# Allegro board tunnel lighting2.brd
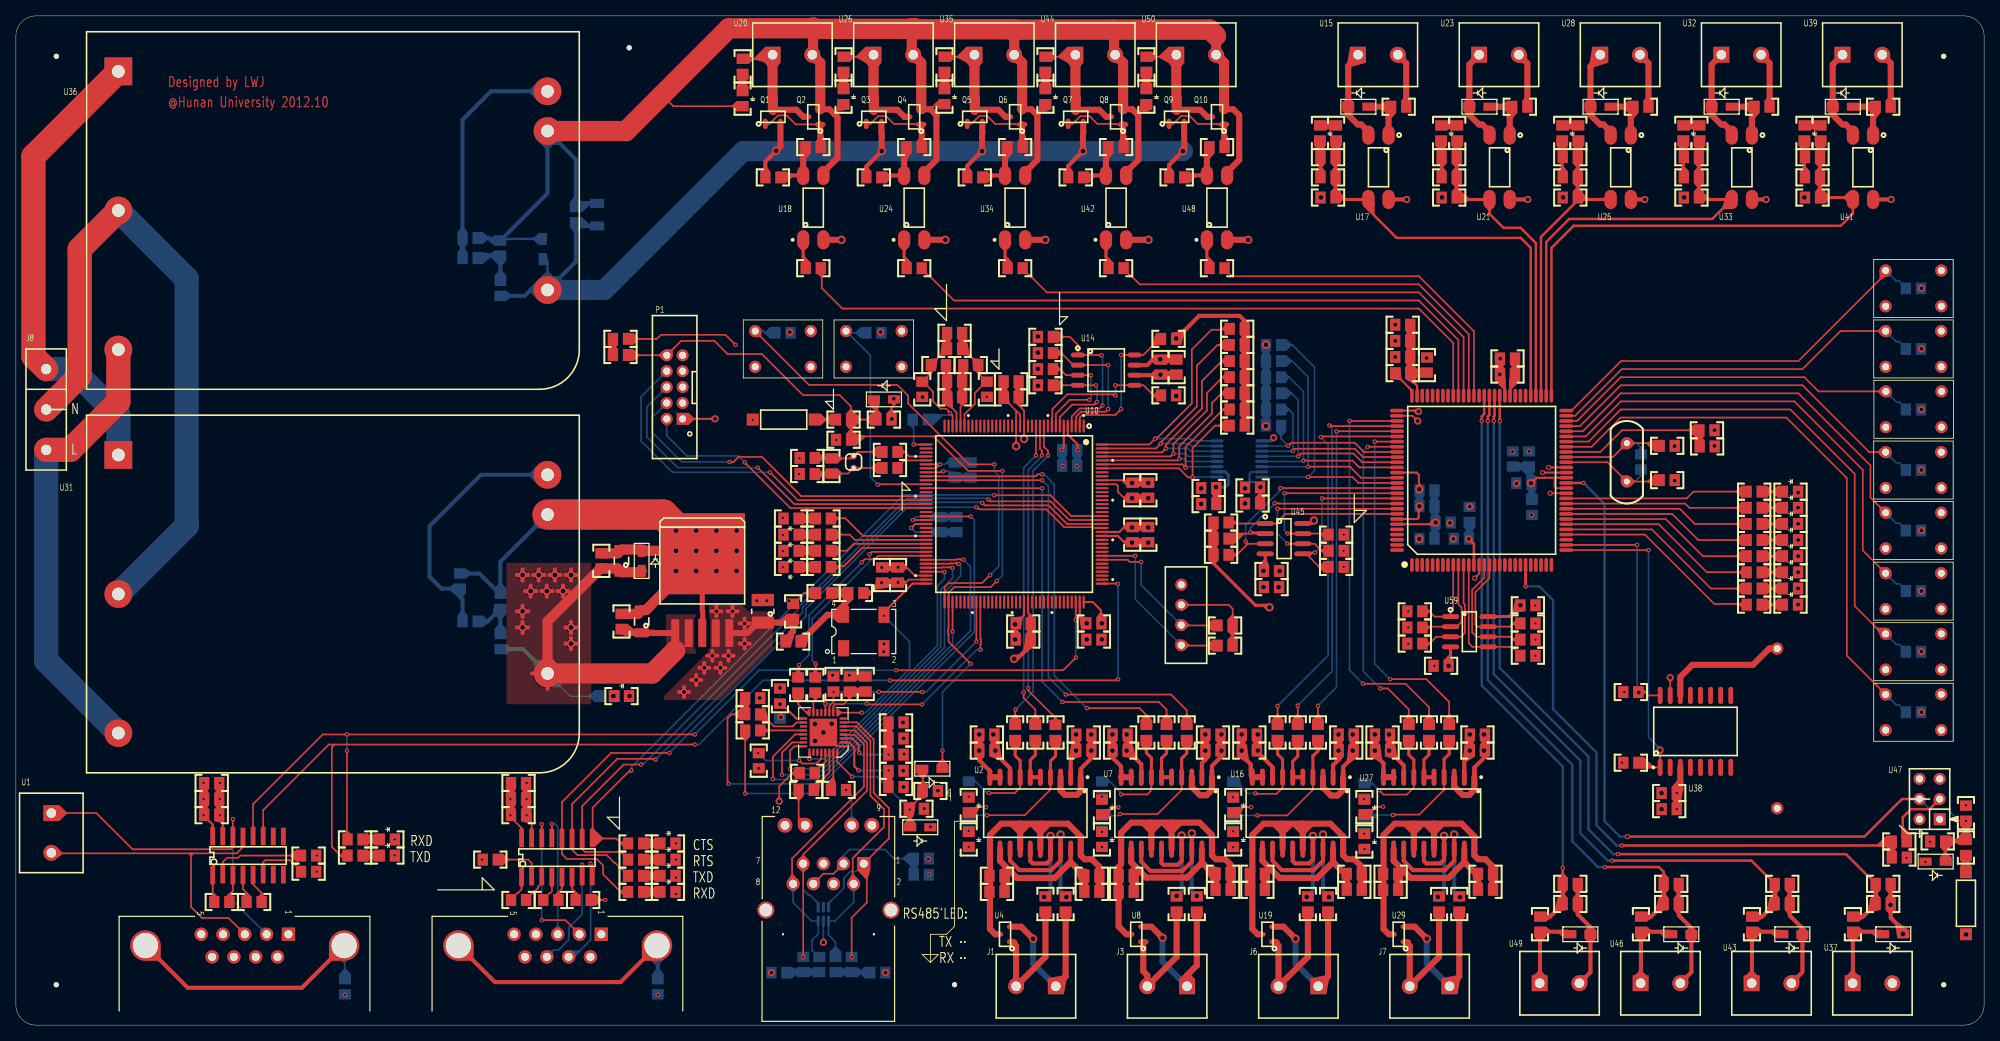
[diagram p0: board, top side]
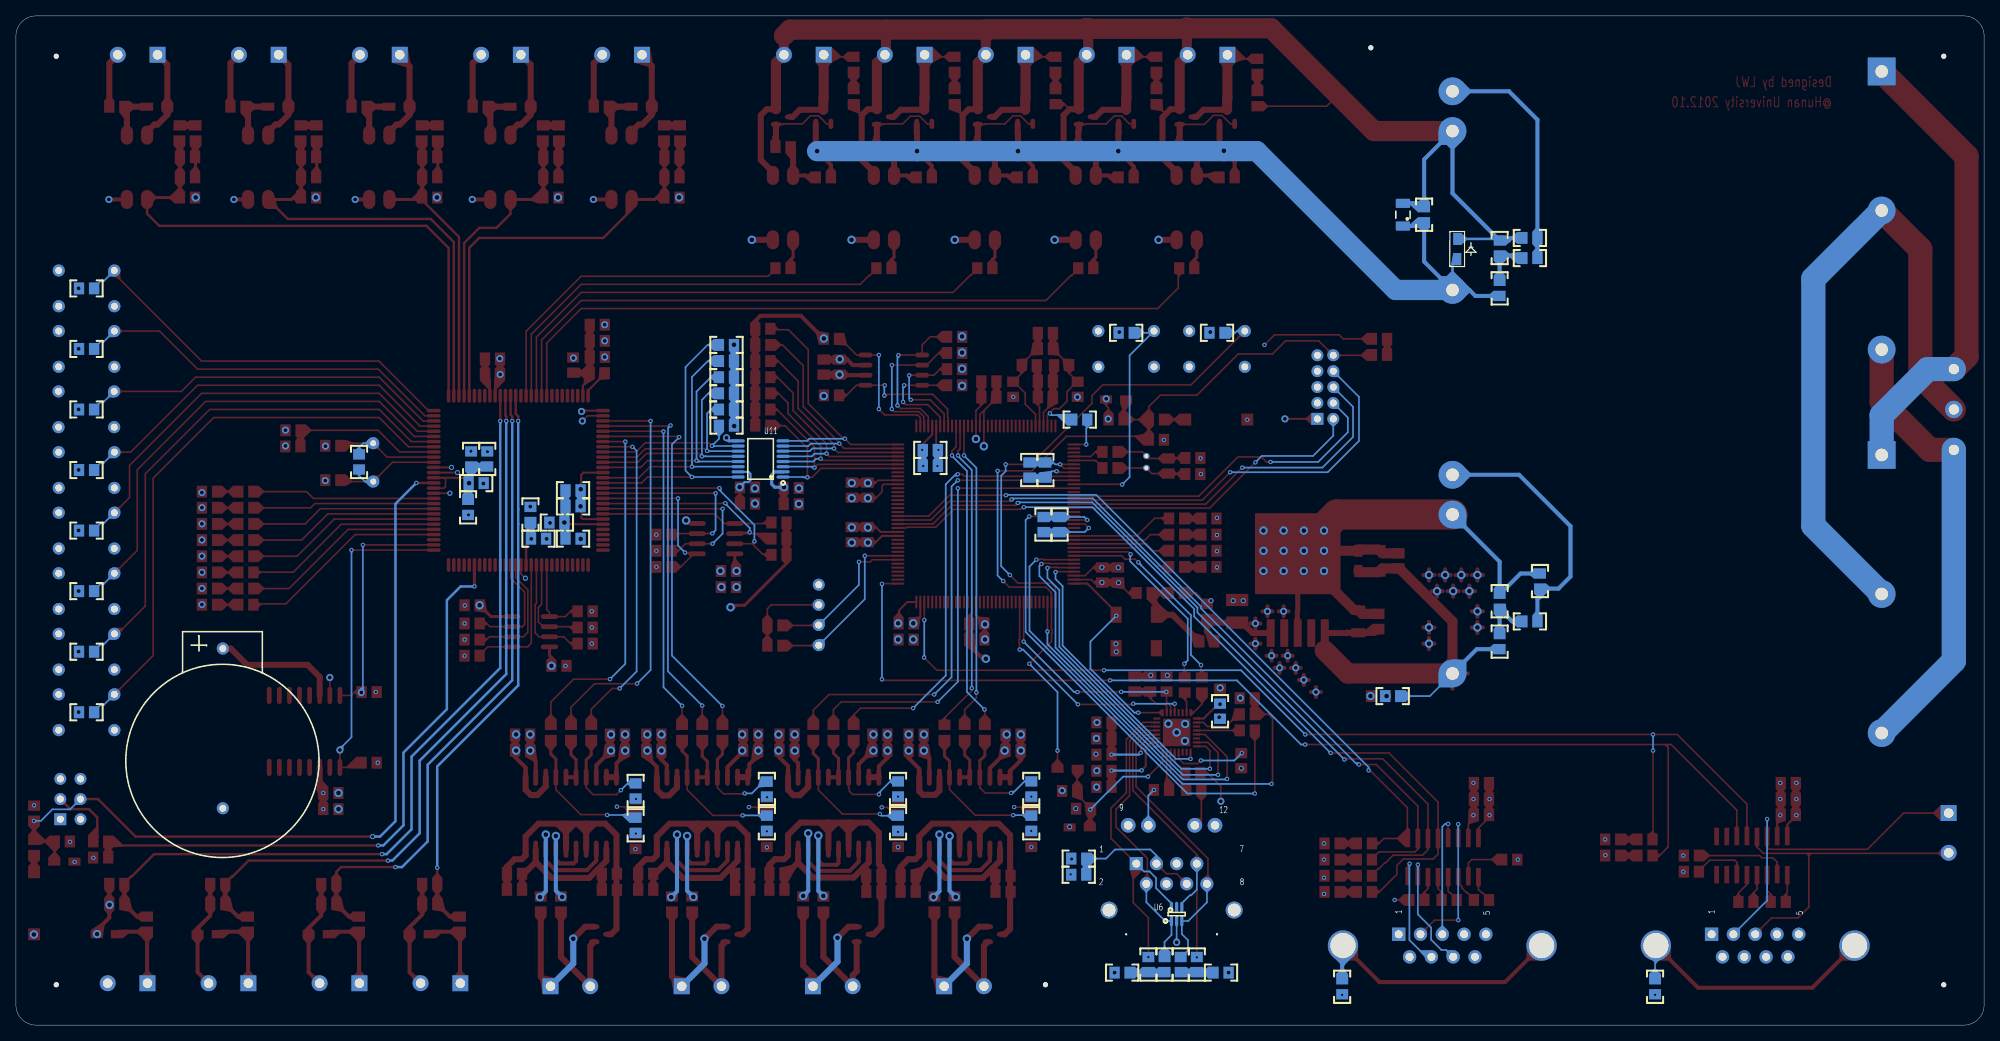
[diagram p1: board, bottom side, seen from below]

Outline 247.65 x 127 mm; copper layers: TOP, GND, POWER, BOTTOM. Coordinates in mm from the lower left corner of the outline.
Outline path: 0,124.46 arc(0.74,126.26) 2.54,127 245.11,127 arc(246.91,126.26) 247.65,124.46 247.65,2.54 arc(246.91,0.74) 245.11,0 2.54,0 arc(0.74,0.74) 0,2.54 0,124.46

## Placement (name value [footprint] x y rotation side)
C1  10uF  [0805]  135.38 18.8 0 top
C2  0.1uF  [0805]  135.38 16.76 0 top
C3  10uF  [0805]  134.37 36.58 0 top
C4  0.1uF  [0805]  134.37 34.54 0 top
C5  0.1uF  [0805]  96.14 41.4 270 top
C6  22uF  [0805]  96.14 39.5 270 bottom
C7  0.01uF  [0805]  24.64 26.42 0 top
C8  0.1uF  [0805]  24.64 30.48 0 top
C9  10uF  [0805]  24.64 28.45 0 top
C10  22uF  [0805]  110.74 36.07 0 top
C11  0.1uF  [0805]  110.74 38.1 180 top
C12  0.1uF  [0805]  110.74 32 180 top
C13  10uF  [0805]  110.74 29.97 0 top
C14  10uF  [0805]  123.44 16.76 180 top
C15  0.1uF  [0805]  123.44 18.8 180 top
C16  10uF  [0805]  122.17 34.54 180 top
C17  0.1uF  [0805]  122.17 36.58 180 top
C18  0.1uF  [0805]  25.91 15.49 0 top
C19  0.1uF  [0805]  29.97 15.49 0 top
C20  100pF  [0805]  106.93 42.93 90 top
C21  0.1uF  [0805]  36.83 21.34 0 top
C22  0.1uF  [0805]  36.83 19.3 0 top
C23  10uF  [0805]  115.06 29.46 0 top
C24  10uF  [0805]  138.94 36.58 180 top
C25  0.1uF  [0805]  138.94 34.54 180 top
C26  10uF  [0805]  139.7 18.8 180 top
C27  0.1uF  [0805]  139.7 16.76 180 top
C28  0.1uF  [0805]  142.49 61.72 270 top
C29  0.01uF  [0805]  140.46 61.72 270 top
C30  0.1uF  [0805]  140.46 67.31 270 top
C31  0.01uF  [0805]  142.49 67.31 270 top
C32  0.01uF  [0805]  63.25 26.42 0 top
C33  0.1uF  [0805]  63.25 28.45 0 top
C34  10uF  [0805]  63.25 30.48 0 top
C35  10uF  [0805]  113.92 18.92 0 bottom
C36  10uF  [0805]  151.89 19.05 0 top
C37  0.1uF  [0805]  151.89 17.02 0 top
C38  10uF  [0805]  150.62 34.54 0 top
C39  0.1uF  [0805]  150.62 36.58 0 top
C40  0.1uF  [0805]  63.25 15.75 0 top
C41  0.1uF  [0805]  67.31 15.75 0 top
C42  0.1uF  [0805]  59.69 20.83 180 top
C43  0.1uF  [0805]  71.37 15.75 0 top
C44  0.1uF  [0805]  126.75 50.55 180 top
C45  0.01uF  [0805]  126.75 48.51 180 top
C46  0.1uF  [0805]  132.59 72.39 180 bottom
C47  0.01uF  [0805]  132.59 70.36 180 bottom
C48  0.1uF  [0805]  96.01 6.6 180 bottom
C49  0.1uF  [0805]  108.46 6.6 0 bottom
C50  0.1uF  [0805]  135.64 50.55 180 top
C51  0.01uF  [0805]  135.64 48.51 180 top
C52  0.1uF  [0805]  125.22 81.03 180 top
C53  0.01uF  [0805]  125.22 78.99 180 top
C54  10uF  [0805]  150.09 67.59 180 top
C55  0.1uF  [0805]  150.09 65.56 180 top
C56  10uF  [0805]  155.6 65.63 180 top
C57  0.1uF  [0805]  155.6 67.67 180 top
C58  0.1uF  [0805]  118.11 78.99 180 top
C59  0.1uF  [0805]  118.11 85.09 180 top
C60  0.01uF  [0805]  118.11 87.12 180 top
C61  0.01uF  [0805]  118.11 81.03 180 top
C62  0.1uF  [0805]  113.79 76.2 180 bottom
C63  10uF  [0805]  146.05 82.8 90 top
C64  0.1uF  [0805]  144.02 82.8 90 top
C65  10uF  [0805]  101.63 54.38 180 top
C66  0.1uF  [0805]  105.69 54.38 0 top
C67  18PF  [0805]  99.57 71.37 0 top
C68  0.1uF  [0805]  111 56.64 270 top
C69  0.01uF  [0805]  108.97 56.64 270 top
C70  0.1uF  [0805]  118.11 69.85 270 bottom
C71  0.01uF  [0805]  120.14 69.85 270 bottom
C72  0.1uF  [0805]  116.33 62.99 270 bottom
C73  0.01uF  [0805]  118.36 62.99 270 bottom
C74  0.1uF  [0805]  104.14 73.66 0 top
C75  18PF  [0805]  99.57 69.34 0 top
C76  103  [0805]  177.55 65.28 180 bottom
C77  104  [0805]  177.55 61.21 180 bottom
C78  10u  [0805]  177.55 67.31 180 bottom
C79  10uF  [0805]  155.19 34.54 180 top
C80  0.1uF  [0805]  155.19 36.58 180 top
C81  10uF  [0805]  156.21 19.05 180 top
C82  0.1uF  [0805]  156.21 17.02 180 top
C83  0.1uF  [0805]  165.1 106.68 180 top
C84  0.01uF  [0805]  165.1 109.22 180 top
C85  10uF  [0805]  167.39 36.58 0 top
C86  10uF  [0805]  168.4 19.05 0 top
C87  0.1uF  [0805]  168.4 17.02 0 top
C88  0.1uF  [0805]  167.39 34.54 0 top
C89  103  [0805]  174.5 86.11 180 top
C90  104  [0805]  174.5 84.07 180 top
C91  10u  [0805]  174.5 88.14 180 top
C92  0.1uF  [0805]  180.34 109.22 180 top
C93  0.01uF  [0805]  180.34 106.68 180 top
C94  220n  [0805]  182.91 64.26 90 bottom
C95  102  [0805]  181.89 61.21 180 bottom
C96  10uF  [0805]  171.96 34.54 180 top
C97  0.1uF  [0805]  171.96 36.58 180 top
C98  10uF  [0805]  172.97 19.05 180 top
C99  0.1uF  [0805]  172.97 17.02 180 top
C100  220n  [0805]  187.68 81.86 180 top
C101  102  [0805]  187.68 83.9 180 top
C102  0.1uF  [0805]  195.58 109.22 180 top
C103  0.01uF  [0805]  195.58 106.68 180 top
C104  10uF  [0805]  184.91 19.05 0 top
C105  0.1uF  [0805]  184.91 17.02 0 top
C106  10uF  [0805]  183.9 34.54 0 top
C107  0.1uF  [0805]  183.9 36.58 0 top
C108  10uF  [CAPA]  76.2 58.42 90 top
C109  0.1uF  [0805]  73.66 58.42 90 top
C110  10uF  [CAPA]  78.74 50.8 90 top
C111  0.1uF  [0805]  76.2 50.8 90 top
C112  22uF  [CAPB]  93.98 52.07 90 top
C113  0.1uF  [0805]  97.79 52.07 90 top
C114  103  [0805]  190.37 71.25 90 bottom
C115  104  [0805]  188.34 71.25 90 bottom
C116  10u  [0805]  190.75 65.15 270 bottom
C117  0.1uF  [0805]  210.82 109.22 180 top
C118  0.01uF  [0805]  210.82 106.68 180 top
C119  10uF  [CAPA]  73.13 101.98 90 bottom
C120  0.1uF  [0805]  70.46 101.98 90 bottom
C121  0.1uF  [0805]  234.95 17.78 0 top
C122  0.1uF  [0805]  234.95 15.24 0 top
C123  10uF  [0805]  208.03 29.21 180 top
C124  0.1uF  [0805]  208.03 27.18 180 top
C125  0.1uF  [0805]  226.06 106.68 180 top
C126  0.01uF  [0805]  226.06 109.22 180 top
C127  0.1uF  [0805]  222.25 17.78 0 top
C128  0.1uF  [0805]  222.25 15.24 0 top
C129  104  [0805]  245.36 26.67 270 top
C130  22p  [0805]  207.77 68.58 0 top
C131  220n  [0805]  212.78 74.85 0 top
C132  22p  [0805]  207.77 72.9 0 top
C133  102  [0805]  212.8 72.82 0 top
C134  0.1uF  [0805]  208.28 15.24 0 top
C135  0.1uF  [0805]  157.99 57.15 180 top
C136  10uF  [0805]  157.99 55.12 180 top
C137  0.1uF  [0805]  195.58 15.24 0 top
C138  0.1uF  [0805]  190.25 52.83 0 top
C139  10uF  [0805]  179.32 45.21 0 top
D1  RED  [0805_LED]  119.89 23.37 270 top
D2  BLUE  [0805_LED]  119.89 27.69 270 top
D3  RED  [0805_LED]  46.74 21.34 0 top
D4  BLUE  [0805_LED]  46.74 23.37 0 top
D5  SCS120V  [SOD-323]  115.32 32.26 0 top
D6  SCS120V  [SOD-323]  113.79 24.89 0 top
D7  RED  [0805_LED]  136.65 23.37 270 top
D8  RED  [0805_LED]  82.04 16.76 0 top
D9  BLUE  [0805_LED]  82.04 18.8 0 top
D10  BLUE  [0805_LED]  136.65 27.43 270 top
D11  RED  [0805_LED]  82.04 20.83 0 top
D12  RED  [0805_LED]  97.54 59.69 180 top
D13  BLUE  [0805_LED]  82.04 22.86 0 top
D14  RED  [0805_LED]  97.54 57.66 180 top
D15  BLUE  [0805_LED]  97.54 63.75 180 top
D16  RED  [0805_LED]  97.54 61.72 180 top
D17  1N6392  [SOD-323]  109.22 78.74 180 top
D18  LED  [0805]  76.07 84.33 0 top
D19  1N4376  [SOD-323]  168.91 115.57 180 top
D20  1N4376  [SOD-323]  184.15 115.57 180 top
D21  RED  [0805_LED]  153.16 23.37 270 top
D22  BLUE  [0805_LED]  153.16 27.69 270 top
D23  1N4376  [SOD-323]  199.39 115.57 180 top
D24  1N4678  [SOD-323]  78.74 58.42 90 top
D25  RED  [0805_LED]  169.67 23.11 270 top
D26  1N4376  [SOD-323]  214.63 115.57 180 top
D27  LED  [0805_LED]  76.2 41.4 0 top
D28  BLUE  [0805_LED]  169.67 27.43 270 top
D29  1N4678  [SOD-323]  66.29 97.66 90 bottom
D30  1N4678  [SOD-323]  236.22 11.43 0 top
D31  1N4376  [SOD-323]  229.87 115.57 180 top
D32  1N6392  [SOD-323]  241.55 20.57 0 top
D33  1N4678  [SOD-323]  223.52 11.43 0 top
D34  LED  [0805_LED]  223.29 52.91 0 top
D35  LED  [0805_LED]  223.29 54.94 0 top
D36  1N4678  [SOD-323]  209.55 11.43 0 top
D37  LED  [0805_LED]  223.29 56.97 0 top
D38  LED  [0805_LED]  223.29 59 0 top
D39  LED  [0805_LED]  223.29 61.04 0 top
D40  LED  [0805_LED]  223.29 63.07 0 top
D41  LED  [0805_LED]  223.29 65.1 0 top
D42  1N4678  [SOD-323]  196.85 11.43 0 top
D43  LED  [0805_LED]  223.29 67.13 0 top
D44  LED  [0805_LED]  91.44 116.59 270 top
D45  LED  [0805_LED]  104.14 116.84 270 top
D46  LED  [0805_LED]  116.84 116.84 270 top
D47  LED  [0805_LED]  129.54 116.84 270 top
D48  LED  [0805_LED]  142.24 116.84 270 top
D49  LED  [0805_LED]  164.08 112.27 270 top
D50  LED  [0805_LED]  179.32 112.27 270 top
D51  LED  [0805_LED]  194.56 112.27 270 top
D52  LED  [0805_LED]  209.8 112.27 270 top
D53  LED  [0805_LED]  225.04 112.27 270 top
J1  CON2  [WJ127_2]  133.35 8.89 180 top
J2  DB9  [CON_DB9S_RA_318]  34.29 11.43 270 top
J3  CON2  [WJ127_2]  149.86 8.89 180 top
J4  DB9  [CON_DB9S_RA_318]  73.66 11.43 270 top
J5  RJ45-8  [CON8_RJ45_TH1]  106.68 20.32 0 top
J6  CON2  [WJ127_2]  166.37 8.89 180 top
J7  CON2  [WJ127_2]  182.88 8.89 180 top
J8  CON3  [WJ2EDGK]  3.81 82.55 270 top
L1  100MHZ  [0805]  110.74 34.04 0 top
L2  470OHM  [0805]  41.4 4.83 270 bottom
L3  100MHZ  [0805]  113.92 20.96 180 bottom
L4  470OHM  [0805]  80.77 4.83 270 bottom
L5  100MHZ  [0805]  122.17 80.01 270 top
L6  100MHZ  [0805]  120.14 83.06 0 top
L7  100MHZ  [0805]  116.08 83.06 180 top
L8  100MHZ  [0805]  114.05 80.01 270 top
L9  120OHM  [0805]  97.79 48.26 180 top
L10  100uH  [0805]  179.58 63.25 180 bottom
L11  100uH  [0805]  177.55 83.06 90 top
L12  100uH  [0805]  189.74 68.2 0 bottom
NOREF  -  [unnamed]  5.08 121.92 0 top
NOREF#2  -  [unnamed]  242.57 121.92 0 top
NOREF#3  -  [unnamed]  118.11 5.08 0 top
NOREF#4  -  [unnamed]  242.57 5.08 0 top
NOREF#5  -  [unnamed]  77.17 122.99 0 top
NOREF#6  -  [unnamed]  5.08 5.08 0 top
P1  HEADER2X5  [CON10_2X5_2MM]  83.82 76.2 90 top
P2  HEADER1X4  [SIP4]  146.63 51.61 0 top
Q1  IRLML5203  [SOT95P237X112-3]  95.25 114.3 0 top
Q2  IRLML2803  [SOT95P237X112-3]  100.33 114.3 90 top
Q3  IRLML5203  [SOT95P237X112-3]  107.95 114.3 0 top
Q4  IRLML2803  [SOT95P237X112-3]  113.03 114.3 90 top
Q5  IRLML5203  [SOT95P237X112-3]  120.65 114.3 0 top
Q6  IRLML2803  [SOT95P237X112-3]  125.73 114.3 90 top
Q7  IRLML5203  [SOT95P237X112-3]  133.35 114.3 0 top
Q8  IRLML2803  [SOT95P237X112-3]  138.43 114.3 90 top
Q9  IRLML5203  [SOT95P237X112-3]  146.05 114.3 0 top
Q10  IRLML2803  [SOT95P237X112-3]  151.13 114.3 90 top
R1  100R  [0805]  132.08 15.24 270 top
R2  33R  [0805]  130.81 36.83 270 top
R3  33R  [0805]  128.27 36.83 270 top
R4  100R  [0805]  129.54 15.24 270 top
R5  33R  [0805]  125.73 36.83 270 top
R6  33R  [0805]  92.71 39.12 180 top
R7  33R  [0805]  92.71 37.08 180 top
R8  10K  [0805]  92.71 41.15 0 top
R9  10K  [0805]  119.89 25.4 270 bottom
R10  6.49K  [0805]  104.9 42.93 270 top
R11  4.7K  [0805]  102.87 42.93 270 top
R12  10K  [0805]  93.47 33.27 270 top
R13  10K  [0805]  99.57 31.75 180 top
R14  10K  [0805]  119.89 29.72 270 bottom
R15  10K  [0805]  42.67 21.34 0 top
R16  33R  [0805]  100.58 42.8 270 top
R17  33R  [0805]  98.42 42.8 270 top
R18  10K  [0805]  113.31 27.23 0 top
R19  10K  [0805]  42.67 23.37 0 top
R20  100R  [0805]  148.59 15.24 270 top
R21  33R  [0805]  147.32 36.83 270 top
R22  100R  [0805]  146.05 15.24 270 top
R23  33R  [0805]  144.78 36.83 270 top
R24  33R  [0805]  142.24 36.83 270 top
R25  10K  [0805]  136.65 25.4 270 bottom
R26  330  [0805]  103.5 29.59 180 top
R27  49.9  [0805]  101.09 7.62 90 bottom
R28  49.9  [0805]  103.12 7.62 90 bottom
R29  10K  [0805]  77.98 16.76 0 top
R30  10K  [0805]  77.98 18.8 0 top
R31  10K  [0805]  136.65 29.72 270 bottom
R32  49.9  [0805]  99.06 7.62 90 bottom
R33  49.9  [0805]  105.16 7.62 90 bottom
R34  330  [0805]  99.44 29.59 0 top
R35  10K  [0805]  77.98 20.83 0 top
R36  4.7K  [0805]  96.52 87.12 180 bottom
R37  4.7K  [0805]  153.67 75.44 180 top
R38  4.7K  [0805]  158.24 85.6 180 bottom
R39  4.7K  [0805]  153.67 77.47 180 top
R40  4.7K  [0805]  107.95 87.12 180 bottom
R41  4.7K  [0805]  158.24 83.57 180 bottom
R42  4.7K  [0805]  153.67 79.5 180 top
R43  4.7K  [0805]  158.24 81.53 180 bottom
R44  10K  [0805]  101.6 59.69 180 top
R45  4.7K  [0805]  153.67 81.53 180 top
R46  4.7K  [0805]  158.24 79.5 180 bottom
R47  10K  [0805]  77.98 22.86 0 top
R48  4.7K  [0805]  153.67 83.57 180 top
R49  4.7K  [0805]  158.24 77.47 180 bottom
R50  4.7K  [0805]  153.67 85.6 180 top
R51  4.7K  [0805]  158.24 75.44 180 bottom
R52  4.7K  [0805]  153.67 87.63 180 top
R53  10K  [0805]  101.6 57.66 180 top
R54  10K  [0805]  101.6 63.75 180 top
R55  10K  [0805]  101.6 61.72 180 top
R56  4.7K  [0805]  145.03 86.36 180 top
R57  4.7K  [0805]  129.54 86.61 0 top
R58  4.7K  [0805]  152.15 50.29 180 top
R59  4.7K  [0805]  129.54 84.58 0 top
R60  4.7K  [0805]  152.15 47.75 180 top
R61  4.7K  [0805]  129.54 82.55 0 top
R62  4.7K  [0805]  129.54 80.52 0 top
R63  4.7K  [0805]  145.03 79.25 0 top
R64  10K  [0805]  109.22 76.2 0 top
R65  0  [0805]  109.98 72.14 0 top
R66  100R  [0805]  104.14 76.2 0 top
R67  1.0M  [0805]  102.62 70.36 270 top
R68  0  [0805]  109.98 70.1 0 top
R69  4.7K  [0805]  76.07 86.36 180 top
R70  10K  [0805]  173.99 115.57 180 top
R71  10K  [0805]  95.25 106.68 180 top
R72  10K  [0805]  100.33 110.49 180 top
R73  100R  [0805]  165.1 15.24 270 top
R74  33R  [0805]  163.83 36.83 270 top
R75  1K  [0805]  100.33 95.25 180 top
R76  100R  [0805]  162.56 15.24 270 top
R77  3.3K  [0805]  165.1 104.14 180 top
R78  33R  [0805]  161.29 36.83 270 top
R79  33R  [0805]  158.75 36.83 270 top
R80  0R  [0805]  174.5 82.04 0 top
R81  10K  [0805]  189.23 115.57 180 top
R82  10K  [0805]  153.16 25.4 270 bottom
R83  3.3K  [0805]  180.34 104.14 180 top
R84  10K  [0805]  107.95 106.68 180 top
R85  10K  [0805]  153.16 29.72 270 bottom
R86  10K  [0805]  113.03 110.49 180 top
R87  1K  [0805]  113.03 95.25 180 top
R88  33R  [0805]  180.34 36.83 270 top
R89  10K  [0805]  204.47 115.57 180 top
R90  3.3K  [0805]  60.96 48.26 90 bottom
R91  100R  [0805]  181.61 15.24 270 top
R92  1K  [0805]  57.15 50.8 180 bottom
R93  ?  [0805]  55.88 55.88 270 bottom
R94  100R  [0805]  179.07 15.24 270 top
R95  3.3K  [0805]  60.96 53.34 90 bottom
R96  33R  [0805]  177.8 36.83 270 top
R97  33R  [0805]  175.26 36.83 270 top
R98  3.3K  [0805]  195.58 104.14 180 top
R99  10K  [0805]  120.65 106.68 180 top
R100  4.7K  [0805]  74.42 41.4 180 bottom
R101  10K  [0805]  125.73 110.49 180 top
R102  10K  [0805]  219.71 115.57 180 top
R103  10K  [0805]  169.67 25.15 270 bottom
R104  1K  [0805]  125.73 95.25 180 top
R105  10K  [0805]  169.67 29.46 270 bottom
R106  3.3K  [0805]  210.82 104.14 180 top
R107  33R  [0805]  231.14 12.7 270 top
R108  4.7K  [0805]  203.2 41.91 0 top
R109  10K  [0805]  234.95 115.57 180 top
R110  10K  [0805]  133.35 106.68 180 top
R111  4.7K  [0805]  203.2 33.02 0 top
R112  10K  [0805]  138.43 110.49 180 top
R113  10K  [0805]  241.81 23.11 0 top
R114  3.3K  [0805]  226.06 104.14 180 top
R115  1K  [0805]  138.43 95.25 180 top
R116  100R  [0805]  245.36 22.35 90 top
R117  10M  [0805]  204.47 70.87 90 bottom
R118  33R  [0805]  218.44 12.7 270 top
R119  ?  [0805]  60.96 92.71 90 bottom
R120  1K  [0805]  57.15 96.52 180 bottom
R121  10K  [0805]  218.72 52.91 0 top
R122  33R  [0805]  204.47 12.7 270 top
R123  10K  [0805]  218.72 54.94 0 top
R124  ?  [0805]  57.15 99.06 180 bottom
R125  10K  [0805]  146.05 106.68 180 top
R126  ?  [0805]  60.96 97.79 90 bottom
R127  4.7K  [0805]  151.64 63.25 0 top
R128  200R  [0805]  208.28 17.78 180 top
R129  4.7K  [0805]  151.64 61.21 0 top
R130  4.7K  [0805]  166.12 61.72 0 top
R131  10K  [0805]  218.72 56.97 0 top
R132  4.7K  [0805]  151.64 59.18 0 top
R133  4.7K  [0805]  166.12 59.69 0 top
R134  10K  [0805]  151.13 110.49 180 top
R135  3.3K  [0805]  236.98 21.08 0 top
R136  4.7K  [0805]  166.12 57.66 0 top
R137  10K  [0805]  218.72 59 0 top
R138  10K  [0805]  218.72 61.04 0 top
R139  1K  [0805]  151.13 95.25 180 top
R140  51R  [0805]  236.98 23.11 0 top
R141  10K  [0805]  218.72 63.07 0 top
R142  10K  [0805]  218.72 65.1 0 top
R143  33R  [0805]  191.77 12.7 270 top
R144  200R  [0805]  195.58 17.78 180 top
R145  10K  [0805]  218.72 67.13 0 top
R146  4.7K  [0805]  238.76 62.23 180 bottom
R147  4.7K  [0805]  238.76 54.61 180 bottom
R148  4.7K  [0805]  238.76 46.99 180 bottom
R149  4.7K  [0805]  238.76 39.37 180 bottom
R150  4.7K  [0805]  238.76 92.71 180 bottom
R151  4.7K  [0805]  238.76 85.09 180 bottom
R152  4.7K  [0805]  238.76 77.47 180 bottom
R153  4.7K  [0805]  238.76 69.85 180 bottom
R154  4.7K  [0805]  91.44 120.65 90 top
R155  4.7K  [0805]  104.14 120.9 90 top
R156  4.7K  [0805]  116.84 120.9 90 top
R157  4.7K  [0805]  129.54 120.9 90 top
R158  4.7K  [0805]  142.24 120.9 90 top
R159  4.7K  [0805]  166.12 112.27 270 top
R160  4.7K  [0805]  181.36 112.27 270 top
R161  4.7K  [0805]  196.6 112.27 270 top
R162  4.7K  [0805]  211.84 112.27 270 top
R163  4.7K  [0805]  227.08 112.27 270 top
R164  4.7K  [0805]  176.02 52.07 0 top
R165  4.7K  [0805]  176.02 50.04 0 top
R166  4.7K  [0805]  176.02 48.01 0 top
R167  4.7K  [0805]  190.25 48.51 0 top
R168  4.7K  [0805]  190.25 50.55 0 top
R169  4.7K  [0805]  190.25 46.48 0 top
SW1  SW KEY-SPST  [SMTSWITCH]  92.71 76.2 0 top
SW2  SW KEY-SPST  [SMTSWITCH]  245.36 11.43 90 top
U1  HEADER1X2  [WJ127_2]  0.46 29.18 270 top
U2  ADM2587E  [SOIC127P1032X265-20]  128.27 26.67 180 top
U3  KSZ8041NL  [QFN32EP]  101.6 36.83 180 top
U4  psm712  [SOT95P237X112-3]  124.46 11.43 90 top
U5  MAX3232ECAE  [SOP16_MAX232]  29.21 21.34 90 top
U6  -  [PLR0504F]  101.6 13.97 180 bottom
U7  ADM2587E  [SOIC127P1032X265-20]  144.78 26.67 180 top
U8  psm712  [SOT95P237X112-3]  140.97 11.43 90 top
U9  MAX3232ECAE  [SOP16_MAX232]  68.07 21.08 90 top
U10  MK60DN512ZVLQ10  [LQFP144NEW]  125.6 64.31 270 top
U11  txb0106  [TSOP65P640X120-16]  153.95 71.25 90 bottom
U12  BTN  [BUTTON4PIN]  96.52 85.09 0 top
U13  BTN  [BUTTON4PIN]  107.95 85.09 0 top
U14  AT45DB321D  [AT45DB321D_SU]  137.19 82.42 270 top
U15  HEADER1X2  [WJ127_2]  166.37 118.11 0 top
U16  ADM2587E  [SOIC127P1032X265-20]  161.29 26.67 180 top
U17  TLPxxx  [TLP127]  171.45 107.95 180 top
U18  TLPxxx  [TLP127]  100.33 102.87 0 top
U19  psm712  [SOT95P237X112-3]  157.48 11.43 90 top
U20  HEADER1X2  [WJ127_2]  92.71 118.11 0 top
U21  TLPxxx  [TLP127]  186.69 107.95 180 top
U22  MC9S12XS 112LPFQ  [LQFP112]  184.43 68.55 90 top
U23  HEADER1X2  [WJ127_2]  181.61 118.11 0 top
U24  TLPxxx  [TLP127]  113.03 102.87 0 top
U25  TLPxxx  [TLP127]  201.93 107.95 180 top
U26  HEADER1X2  [WJ127_2]  105.41 118.11 0 top
U27  ADM2587E  [SOIC127P1032X265-20]  177.8 26.67 180 top
U28  HEADER1X2  [WJ127_2]  196.85 118.11 0 top
U29  psm712  [SOT95P237X112-3]  173.99 11.43 90 top
U30  TPS7A4533  [TO170P1524X483-6]  86.36 55.88 0 top
U31  ADDC  [ACDC]  8.89 31.75 0 top
U32  HEADER1X2  [WJ127_2]  212.09 118.11 0 top
U33  TLPxxx  [TLP127]  217.17 107.95 180 top
U34  TLPxxx  [TLP127]  125.73 102.87 0 top
U35  HEADER1X2  [WJ127_2]  118.11 118.11 0 top
U36  ADDC  [ACDC]  8.89 80.01 0 top
U37  HEADER1X2  [WJ127_2]  228.6 1.27 0 top
U38  DS1338C  [SOIC127P1032X265-16]  211.33 36.96 0 top
U39  HEADER1X2  [WJ127_2]  227.33 118.11 0 top
U40  HEADER1X2  [DIANCHI]  221.62 37.34 180 bottom
U41  TLPxxx  [TLP127]  232.41 107.95 180 top
U42  TLPxxx  [TLP127]  138.43 102.87 0 top
U43  HEADER1X2  [WJ127_2]  215.9 1.27 0 top
U44  HEADER1X2  [WJ127_2]  130.81 118.11 0 top
U45  AT25512  [SOIC127P600X175-8]  159.56 61.21 270 top
U46  HEADER1X2  [WJ127_2]  201.93 1.27 0 top
U47  HEADER2X3  [HDR254M-2X3]  242.06 25.91 90 top
U48  TLPxxx  [TLP127]  151.13 102.87 0 top
U49  HEADER1X2  [WJ127_2]  189.23 1.27 0 top
U50  HEADER1X2  [WJ127_2]  143.51 118.11 0 top
U51  BTN  [BUTTON4PIN]  238.76 62.23 0 top
U52  BTN  [BUTTON4PIN]  238.76 54.61 0 top
U53  BTN  [BUTTON4PIN]  238.76 46.99 0 top
U54  BTN  [BUTTON4PIN]  238.76 39.37 0 top
U55  BTN  [BUTTON4PIN]  238.76 92.71 0 top
U56  BTN  [BUTTON4PIN]  238.76 85.09 0 top
U57  BTN  [BUTTON4PIN]  238.79 77.5 0 top
U58  BTN  [BUTTON4PIN]  238.76 69.85 0 top
U59  AT25512  [SOIC127P600X175-8]  182.88 49.5 270 top
Y1  50MHz  [XTLOSC4_SM]  106.68 49.53 0 top
Y2  32.768KHz  [DIP2_CRYSTAL]  105.41 70.87 270 top
Y3  16M  [XTAL]  202.69 68.4 90 top

## Library data of the parts
C1-C4 C7-C9 C14-C19 C21 C22 C24-C27 C32-C34 C36-C43 C54-C57 C63 C64 C74 C76-C107 C114-C118 C121-C139 = CAP NP
C5 C11 C12 C20 C23 C28-C31 C44-C53 C58-C62 C65 C66 C68-C73 C109 C111 C113 C120 = CAP NP: room: DSP
C6 C10 C13 C35 = CAP_POL
C67 C75 = CAP_NP
C108 C110 C112 C119 = C: User Part Number: pn; Tolerance: RichardLC; room: DSP
D1-D4 D7-D16 D18 D21 D22 D25 D27 D28 D34 D35 D37-D41 D43-D53 = LED
D5 D6 = DIODE_SCHTKY
D17 D32 = 1N6392
D19 D20 D23 D26 D31 = 1N4376
D24 D29 D30 D33 D36 D42 = 1N4678
J1 J3 J6 J7 = CON2
J2 J4 = CONN_DB9F_MTGTABS
J5 = J1011F01PNL
J8 = CON3
L1 L3 L5-L8 = IND
L2 L4 L10-L12 = INDUCTOR
L9 = BEAD_FERRITE
P1 = HEADER2X5
P2 = HEADER1X4: room: DSP
Q1 Q3 Q5 Q7 Q9 = IRF9Z14/TO_3
Q2 Q4 Q6 Q8 Q10 = 2N6823_1
R1-R63 R69 R71-R74 R76-R79 R82-R86 R88 R90-R99 R101 R103 R105-R108 R110-R112 R114 R118-R134 R136-R138 R141-R153 R164-R169 = R
R64 R66 R70 R75 R80 R81 R87 R89 R100 R102 R104 R109 R113 R115-R117 R135 R139 R140 R154-R163 = R2
R65 R67 R68 = RES
SW1 SW2 = SW KEY-SPST: room: DSP
U1 U15 U20 U23 U26 U28 U32 U35 U37 U39 U40 U43 U44 U46 U49 U50 = HEADER1X2
U2 U7 U16 U27 = ADM2587E
U3 = KSZ8041NL
U4 U8 U19 U29 = psm712
U5 U9 = MAX3232_0
U6 = PLR0504F
U10 = K60
U11 = txb0106
U12 U13 U51-U58 = BTN
U14 = AT45DB321E
U17 U18 U21 U24 U25 U33 U34 U41 U42 U48 = TLP624_1
U22 = xs128_1
U30 = TPS7A45XX_0: User Part Number: pn; Tolerance: RichardLC
U31 U36 = ADDC_0
U38 = DS1338C
U45 U59 = AT25512
U47 = HEADER2X3
Y1 = CLKGEN-SM
Y2 = XTAL: Tolerance: RichardLC; User Part Number: pn
Y3 = CRYSTAL

## Footprints (pads in the part's own frame, mm; a bottom-side part is the same pattern mirrored in y, then rotated)
0805
  rect 1.3x1.5 smd: 1(-0.95,0) 2(0.95,0)
0805_LED
  rect 1.3x1.5 smd: 1(-0.95,0) 2(0.95,0)
ACDC
  rect 3.5x3.5 hole 1.6: 1(4,40)
  round 3.5 hole 1.6: 2(4,22.5) 3(4,5) 4(58,12.5) 5(58,32.5) 6(58,37.5)
AT45DB321D_SU
  oval 0.61x1.75 smd: 1(-1.905,-3.565) 2(-0.635,-3.565) 3(0.635,-3.565) 4(1.905,-3.565) 5(1.905,3.565) 6(0.635,3.565) 7(-0.635,3.565) 8(-1.905,3.565)
BUTTON4PIN
  round 1.524 hole 0.889: 1(-3.5,2.25) 2(-3.5,-2.25) 3(3.5,-2.25) 4(3.5,2.25)
CAPA
  custom 1.15x1.8 smd: 1(-1.425,0) 2(1.425,0)
CAPB
  custom 1.55x2.8 smd: 1(-1.425,0) 2(1.425,0)
CON8_RJ45_TH1
  round 0.254 hole 3.251 unplated: (-10.16,-8.89) (1.27,-8.89)
  rect 1.651x1.651 hole 1.016: 1(0,0)
  round 1.651 hole 1.016: 2(-1.27,-2.54) 3(-2.54,0) 4(-3.81,-2.54) 5(-5.08,0) 6(-6.35,-2.54) 7(-7.62,0) 8(-8.89,-2.54)
  round 1.854 hole 1.092: 9(1.016,4.826) 10(-1.524,4.826) 11(-7.366,4.826) 12(-9.906,4.826)
  round 2.134 hole 1.626: CG1(3.429,-5.842) CG2(-12.319,-5.842)
CON10_2X5_2MM
  rect 1.5x1.5 hole 0.9: 1(0.09,-0.07)
  round 1.5 hole 0.9: 2(0.09,1.93) 3(2.09,-0.07) 4(2.09,1.93) 5(4.09,-0.07) 6(4.09,1.93) 7(6.09,-0.07) 8(6.09,1.93) 9(8.09,-0.07) 10(8.09,1.93)
CON_DB9S_RA_318
  rect 1.676x1.676 hole 1.016: 1(0,0)
  round 1.676 hole 1.016: 2(0,-2.743) 3(0,-5.486) 4(0,-8.23) 5(0,-10.973) 6(2.845,-1.372) 7(2.845,-4.115) 8(2.845,-6.858) 9(2.845,-9.601)
  round 3.81 hole 3.175: M1(1.422,7.01) M2(1.422,-17.983)
DIANCHI
  round 1.524 hole 0.889: 1(0,10.05) 2(0,-10.05)
DIP2_CRYSTAL
  round 0.8 hole 0.5: 1(-0.75,0) 2(0.75,0)
HDR254M-2X3
  rect 1.5x1.5 hole 0.9: 1(0,0)
  round 1.5 hole 0.9: 2(0,2.54) 3(2.54,0) 4(2.54,2.54) 5(5.08,0) 6(5.08,2.54)
LQFP112
  oval 1.75x0.45 smd: 1(-10.65,8.775) 2(-10.65,8.125) 3(-10.65,7.475) 4(-10.65,6.825) 5(-10.65,6.175) 6(-10.65,5.525) 7(-10.65,4.875) 8(-10.65,4.225) 9(-10.65,3.575) 10(-10.65,2.925) 11(-10.65,2.275) 12(-10.65,1.625) 13(-10.65,0.975) 14(-10.65,0.325) 15(-10.65,-0.325) 16(-10.65,-0.975) 17(-10.65,-1.625) 18(-10.65,-2.275) 19(-10.65,-2.925) 20(-10.65,-3.575) 21(-10.65,-4.225) 22(-10.65,-4.875) 23(-10.65,-5.525) 24(-10.65,-6.175) 25(-10.65,-6.825) 26(-10.65,-7.475) 27(-10.65,-8.125) 28(-10.65,-8.775) 57(10.65,-8.775) 58(10.65,-8.125) 59(10.65,-7.475) 60(10.65,-6.825) 61(10.65,-6.175) 62(10.65,-5.525) 63(10.65,-4.875) 64(10.65,-4.225) 65(10.65,-3.575) 66(10.65,-2.925) 67(10.65,-2.275) 68(10.65,-1.625) 69(10.65,-0.975) 70(10.65,-0.325) 71(10.65,0.325) 72(10.65,0.975) 73(10.65,1.625) 74(10.65,2.275) 75(10.65,2.925) 76(10.65,3.575) 77(10.65,4.225) 78(10.65,4.875) 79(10.65,5.525) 80(10.65,6.175) 81(10.65,6.825) 82(10.65,7.475) 83(10.65,8.125) 84(10.65,8.775)
  oval 0.45x1.75 smd: 29(-8.775,-10.65) 30(-8.125,-10.65) 31(-7.475,-10.65) 32(-6.825,-10.65) 33(-6.175,-10.65) 34(-5.525,-10.65) 35(-4.875,-10.65) 36(-4.225,-10.65) 37(-3.575,-10.65) 38(-2.925,-10.65) 39(-2.275,-10.65) 40(-1.625,-10.65) 41(-0.975,-10.65) 42(-0.325,-10.65) 43(0.325,-10.65) 44(0.975,-10.65) 45(1.625,-10.65) 46(2.275,-10.65) 47(2.925,-10.65) 48(3.575,-10.65) 49(4.225,-10.65) 50(4.875,-10.65) 51(5.525,-10.65) 52(6.175,-10.65) 53(6.825,-10.65) 54(7.475,-10.65) 55(8.125,-10.65) 56(8.775,-10.65) 85(8.775,10.65) 86(8.125,10.65) 87(7.475,10.65) 88(6.825,10.65) 89(6.175,10.65) 90(5.525,10.65) 91(4.875,10.65) 92(4.225,10.65) 93(3.575,10.65) 94(2.925,10.65) 95(2.275,10.65) 96(1.625,10.65) 97(0.975,10.65) 98(0.325,10.65) 99(-0.325,10.65) 100(-0.975,10.65) 101(-1.625,10.65) 102(-2.275,10.65) 103(-2.925,10.65) 104(-3.575,10.65) 105(-4.225,10.65) 106(-4.875,10.65) 107(-5.525,10.65) 108(-6.175,10.65) 109(-6.825,10.65) 110(-7.475,10.65) 111(-8.125,10.65) 112(-8.775,10.65)
LQFP144NEW
  oval 1.65x0.27 smd: 1(-11.075,8.75) 2(-11.075,8.25) 3(-11.075,7.75) 4(-11.075,7.25) 5(-11.075,6.75) 6(-11.075,6.25) 7(-11.075,5.75) 8(-11.075,5.25) 9(-11.075,4.75) 10(-11.075,4.25) 11(-11.075,3.75) 12(-11.075,3.25) 13(-11.075,2.75) 14(-11.075,2.25) 15(-11.075,1.75) 16(-11.075,1.25) 17(-11.075,0.75) 18(-11.075,0.25) 19(-11.075,-0.25) 20(-11.075,-0.75) 21(-11.075,-1.25) 22(-11.075,-1.75) 23(-11.075,-2.25) 24(-11.075,-2.75) 25(-11.075,-3.25) 26(-11.075,-3.75) 27(-11.075,-4.25) 28(-11.075,-4.75) 29(-11.075,-5.25) 30(-11.075,-5.75) 31(-11.075,-6.25) 32(-11.075,-6.75) 33(-11.075,-7.25) 34(-11.075,-7.75) 35(-11.075,-8.25) 36(-11.075,-8.75) 73(11.075,-8.75) 74(11.075,-8.25) 75(11.075,-7.75) 76(11.075,-7.25) 77(11.075,-6.75) 78(11.075,-6.25) 79(11.075,-5.75) 80(11.075,-5.25) 81(11.075,-4.75) 82(11.075,-4.25) 83(11.075,-3.75) 84(11.075,-3.25) 85(11.075,-2.75) 86(11.075,-2.25) 87(11.075,-1.75) 88(11.075,-1.25) 89(11.075,-0.75) 90(11.075,-0.25) 91(11.075,0.25) 92(11.075,0.75) 93(11.075,1.25) 94(11.075,1.75) 95(11.075,2.25) 96(11.075,2.75) 97(11.075,3.25) 98(11.075,3.75) 99(11.075,4.25) 100(11.075,4.75) 101(11.075,5.25) 102(11.075,5.75) 103(11.075,6.25) 104(11.075,6.75) 105(11.075,7.25) 106(11.075,7.75) 107(11.075,8.25) 108(11.075,8.75)
  oval 0.27x1.65 smd: 37(-8.75,-11.075) 38(-8.25,-11.075) 39(-7.75,-11.075) 40(-7.25,-11.075) 41(-6.75,-11.075) 42(-6.25,-11.075) 43(-5.75,-11.075) 44(-5.25,-11.075) 45(-4.75,-11.075) 46(-4.25,-11.075) 47(-3.75,-11.075) 48(-3.25,-11.075) 49(-2.75,-11.075) 50(-2.25,-11.075) 51(-1.75,-11.075) 52(-1.25,-11.075) 53(-0.75,-11.075) 54(-0.25,-11.075) 55(0.25,-11.075) 56(0.75,-11.075) 57(1.25,-11.075) 58(1.75,-11.075) 59(2.25,-11.075) 60(2.75,-11.075) 61(3.25,-11.075) 62(3.75,-11.075) 63(4.25,-11.075) 64(4.75,-11.075) 65(5.25,-11.075) 66(5.75,-11.075) 67(6.25,-11.075) 68(6.75,-11.075) 69(7.25,-11.075) 70(7.75,-11.075) 71(8.25,-11.075) 72(8.75,-11.075) 109(8.75,11.075) 110(8.25,11.075) 111(7.75,11.075) 112(7.25,11.075) 113(6.75,11.075) 114(6.25,11.075) 115(5.75,11.075) 116(5.25,11.075) 117(4.75,11.075) 118(4.25,11.075) 119(3.75,11.075) 120(3.25,11.075) 121(2.75,11.075) 122(2.25,11.075) 123(1.75,11.075) 124(1.25,11.075) 125(0.75,11.075) 126(0.25,11.075) 127(-0.25,11.075) 128(-0.75,11.075) 129(-1.25,11.075) 130(-1.75,11.075) 131(-2.25,11.075) 132(-2.75,11.075) 133(-3.25,11.075) 134(-3.75,11.075) 135(-4.25,11.075) 136(-4.75,11.075) 137(-5.25,11.075) 138(-5.75,11.075) 139(-6.25,11.075) 140(-6.75,11.075) 141(-7.25,11.075) 142(-7.75,11.075) 143(-8.25,11.075) 144(-8.75,11.075)
PLR0504F
  oval 0.4x1.36 smd: 1(-0.65,-0.87) 2(0,-0.87) 3(0.65,-0.87) 4(0.65,0.87) 5(0,0.87) 6(-0.65,0.87)
QFN32EP
  rect 0.889x0.279 smd: 1(-2.489,1.75) 2(-2.489,1.252) 3(-2.489,0.752) 4(-2.489,0.251) 5(-2.489,-0.251) 6(-2.489,-0.752) 7(-2.489,-1.252) 8(-2.489,-1.75) 17(2.489,-1.75) 18(2.489,-1.252) 19(2.489,-0.752) 20(2.489,-0.251) 21(2.489,0.251) 22(2.489,0.752) 23(2.489,1.252) 24(2.489,1.75)
  rect 0.279x0.889 smd: 9(-1.75,-2.489) 10(-1.252,-2.489) 11(-0.752,-2.489) 12(-0.251,-2.489) 13(0.251,-2.489) 14(0.752,-2.489) 15(1.252,-2.489) 16(1.75,-2.489) 25(1.75,2.489) 26(1.252,2.489) 27(0.752,2.489) 28(0.251,2.489) 29(-0.251,2.489) 30(-0.752,2.489) 31(-1.252,2.489) 32(-1.75,2.489)
  rect 3.454x3.454 smd: 33(0,0)
SIP4
  round 1.5 hole 0.9: 1(0,3.81) 2(0,1.27) 3(0,-1.27) 4(0,-3.81)
SMTSWITCH
  rect 1.5x1.5 smd: 1(0,0) 2(7.8,0)
SOD-323
  rect 1.524x1.016 smd: 1(1.27,0) 2(-1.27,0)
SOIC127P600X175-8
  oval 0.61x2.17 smd: 1(-1.905,-2.365) 2(-0.635,-2.365) 3(0.635,-2.365) 4(1.905,-2.365) 5(1.905,2.365) 6(0.635,2.365) 7(-0.635,2.365) 8(-1.905,2.365)
SOIC127P1032X265-16
  oval 0.6x2.17 smd: 1(-4.445,-4.528) 2(-3.175,-4.528) 3(-1.905,-4.528) 4(-0.635,-4.528) 5(0.635,-4.528) 6(1.905,-4.528) 7(3.175,-4.528) 8(4.445,-4.528) 9(4.445,4.528) 10(3.175,4.528) 11(1.905,4.528) 12(0.635,4.528) 13(-0.635,4.528) 14(-1.905,4.528) 15(-3.175,4.528) 16(-4.445,4.528)
SOIC127P1032X265-20
  oval 0.61x2.17 smd: 1(-5.715,-4.528) 2(-4.445,-4.528) 3(-3.175,-4.528) 4(-1.905,-4.528) 5(-0.635,-4.528) 6(0.635,-4.528) 7(1.905,-4.528) 8(3.175,-4.528) 9(4.445,-4.528) 10(5.715,-4.528) 11(5.715,4.528) 12(4.445,4.528) 13(3.175,4.528) 14(1.905,4.528) 15(0.635,4.528) 16(-0.635,4.528) 17(-1.905,4.528) 18(-3.175,4.528) 19(-4.445,4.528) 20(-5.715,4.528)
SOP16_MAX232
  rect 2.2x0.6 smd: 1(-2.4,4.445) 2(-2.4,3.175) 3(-2.4,1.905) 4(-2.4,0.635) 5(-2.4,-0.635) 6(-2.4,-1.905) 7(-2.4,-3.175) 8(-2.4,-4.445) 9(2.4,-4.445) 10(2.4,-3.175) 11(2.4,-1.905) 12(2.4,-0.635) 13(2.4,0.635) 14(2.4,1.905) 15(2.4,3.175) 16(2.4,4.445)
SOT95P237X112-3
  oval 0.6x1.3 smd: 1(-0.95,-0.885) 2(0.95,-0.885) 3(0,0.885)
TLP127
  oval 1.54x2.4 smd: 1(-1.27,-4.05) 2(1.27,-4.05) 3(1.27,4.05) 4(-1.27,4.05)
TO170P1524X483-6
  custom 1.01x3.49 smd: 1(-3.4,-6.545) 2(-1.7,-6.545) 3(0,-6.545) 4(1.7,-6.545) 5(3.4,-6.545)
  custom 10.77x10.2 smd: 6(0,3.44)
TSOP65P640X120-16
  oval 0.4x1.65 smd: 1(-2.275,-2.825) 2(-1.625,-2.825) 3(-0.975,-2.825) 4(-0.325,-2.825) 5(0.325,-2.825) 6(0.975,-2.825) 7(1.625,-2.825) 8(2.275,-2.825) 9(2.275,2.825) 10(1.625,2.825) 11(0.975,2.825) 12(0.325,2.825) 13(-0.325,2.825) 14(-0.975,2.825) 15(-1.625,2.825) 16(-2.275,2.825)
unnamed
  round 0.635 hole 3.175 unplated: (0,0)
WJ2EDGK
  rect 2.2x2.2 hole 1.3: 1(0,0)
  round 2.2 hole 1.3: 2(5.08,0) 3(10.16,0)
WJ127_2
  rect 2x2 hole 1.2: 1(2.5,4)
  round 2 hole 1.2: 2(7.5,4)
XTAL
  round 1.524 hole 0.762: 1(0,0) 2(4.826,0)
XTLOSC4_SM
  rect 1.397x2.032 smd: 1(-2.54,-2.11) 2(2.54,-2.11) 3(2.54,2.11) 4(-2.54,2.11)

## Nets
GND: C3.2 C4.2 C5.1 C6.2 C7.2 C8.2 C9.2 C10.2 C11.1 C12.1 C13.2 C16.2 C17.2 C20.2 C21.2 C22.2 C23.2 C24.2 C25.2 C28.2 C29.2 C30.2 C31.2 C32.2 C33.2 C34.2 C35.2 C38.2 C39.2 C42.2 C43.2 C44.2 C45.2 C46.2 C47.2 C48.2 C49.2 C50.2 C51.2 C52.2 C53.2 C54.2 C55.2 C56.2 C57.2 C63.2 C64.2 C65.2 C66.2 C67.1 C68.2 C69.2 C70.2 C71.2 C72.2 C73.2 C74.1 C75.1 C76.2 C77.2 C78.2 C79.2 C80.2 C85.2 C88.2 C89.2 C90.2 C91.2 C94.2 C95.2 C96.2 C97.2 C100.2 C101.2 C106.2 C107.2 C108.2 C109.2 C110.2 C111.2 C112.2 C113.2 C114.2 C115.2 C116.2 C121.2 C122.2 C123.2 C124.2 C127.2 C128.2 C129.1 C130.2 C131.2 C132.2 C133.2 C134.2 C135.2 C136.2 C137.2 C138.2 C139.2 D1.2(CATHODE) D2.2(CATHODE) D3.2(CATHODE) D4.2(CATHODE) D7.2(CATHODE) D8.2(CATHODE) D9.2(CATHODE) D10.2(CATHODE) D11.2(CATHODE) D12.2(CATHODE) D13.2(CATHODE) D14.2(CATHODE) D15.2(CATHODE) D16.2(CATHODE) D21.2(CATHODE) D22.2(CATHODE) D24.1(A) D25.2(CATHODE) D27.2(CATHODE) D28.2(CATHODE) D30.1(A) D33.1(A) D34.2(CATHODE) D35.2(CATHODE) D36.1(A) D37.2(CATHODE) D38.2(CATHODE) D39.2(CATHODE) D40.2(CATHODE) D41.2(CATHODE) D42.1(A) D43.2(CATHODE) J2.5 J4.5 J5.4(CHSGND1) J5.5(CHSGND2) J5.CG1(SHIELD1) J5.CG2(SHIELD2) L2.2 L4.2 L8.2 P1.3 P1.5 P2.1 R8.2 R10.1 R13.2 R77.2 R83.2 R93.1 R95.2 R98.2 R106.2 R114.2 R128.1 R144.1 SW1.1 SW2.1 U2.1(GND1#1) U2.3(GND1#3) U2.9(GND1#9) U2.10(GND1#10) U3.1(GND) U3.33(PAD) U5.15(GND) U6.2 U7.1(GND1#1) U7.3(GND1#3) U7.9(GND1#9) U7.10(GND1#10) U9.15(GND) U10.6(VSS#6) U10.17(VSS#17) U10.18(VSS#18) U10.44(VSS#44) U10.57(VSS#57) U10.71(VSS#71) U10.93(VSS#93) U10.107(VSS#107) U10.121(VSS#121) U10.134(VSS#134) U11.9(GND) U12.2 U12.3 U13.2 U13.3 U14.7(GND) U16.1(GND1#1) U16.3(GND1#3) U16.9(GND1#9) U16.10(GND1#10) U18.2(CATHODE) U22.14(VSS1) U22.40(VSSX2) U22.44(VSS3) U22.45(VSSPLL) U22.66(VSS2) U22.85(VRL) U22.86(VSSA) U22.97(TEST) U22.106(VSSX1) U24.2(CATHODE) U27.1(GND1#1) U27.3(GND1#3) U27.9(GND1#9) U27.10(GND1#10) U30.3(GND#3) U30.6(GND#6) U31.5(GND) U34.2(CATHODE) U37.2 U38.15(GND) U40.2 U42.2(CATHODE) U43.2 U45.4(GND) U46.2 U47.2 U48.2(CATHODE) U49.2 U51.2 U51.3 U52.2 U52.3 U53.2 U53.3 U54.2 U54.3 U55.2 U55.3 U56.2 U56.3 U57.2 U57.3 U58.2 U58.3 U59.4(GND) Y1.2(GND)
GND2_1: C1.2 C2.2 C14.2 C15.2 U2.11(GND2#11) U2.14(GND2#14) U2.16(GND2#16) U2.20(GND2#20) U4.3
GND2_2: C26.2 C27.2 C36.2 C37.2 U7.11(GND2#11) U7.14(GND2#14) U7.16(GND2#16) U7.20(GND2#20) U8.3
GND2_3: C81.2 C82.2 C86.2 C87.2 U16.11(GND2#11) U16.14(GND2#14) U16.16(GND2#16) U16.20(GND2#20) U19.3
GND2_4: C98.2 C99.2 C104.2 C105.2 U27.11(GND2#11) U27.14(GND2#14) U27.16(GND2#16) U27.20(GND2#20) U29.3
GND_24V: C119.2 C120.2 D29.1(A) D44.2(CATHODE) D45.2(CATHODE) D46.2(CATHODE) D47.2(CATHODE) D48.2(CATHODE) Q2.2(S) Q4.2(S) Q6.2(S) Q8.2(S) Q10.2(S) R124.1 R126.2 U18.3(EMITTER) U20.2 U24.3(EMITTER) U26.2 U34.3(EMITTER) U35.2 U36.5(GND) U42.3(EMITTER) U44.2 U48.3(EMITTER) U50.2
VBAT: U38.14(VBAT) U40.1
VCC_3V3: C3.1 C4.1 C5.2 C6.1 C7.1 C8.1 C9.1 C16.1 C17.1 C24.1 C25.1 C28.1 C29.1 C30.1 C31.1 C32.1 C33.1 C34.1 C38.1 C39.1 C44.1 C45.1 C46.1 C47.1 C50.1 C51.1 C52.1 C53.1 C54.1 C55.1 C63.1 C64.1 C68.1 C69.1 C70.1 C71.1 C72.1 C73.1 C112.1 C113.1 D6.1(C) D17.2(K) J5.9(RLEDA) J5.12(LLEDA) L1.2 L3.1 L5.2 L9.2 P1.1 P2.2 R11.1 R12.2 R18.2 R36.1 R37.1 R39.1 R40.1 R42.1 R45.1 R48.1 R50.1 R52.1 R56.1 R57.1 R58.1 R59.1 R60.1 R61.1 R62.1 R63.2 R64.2 R69.1 U2.2(VCC#2) U2.8(VCC#8) U3.17(VDDIO_3V3) U5.16(VCC) U7.2(VCC#2) U7.8(VCC#8) U9.16(VCC) U10.5(VDD#5) U10.16(VDD#16) U10.42(VBAT) U10.43(VDD#43) U10.56(VDD#56) U10.70(VDD#70) U10.94(VDD#94) U10.108(VDD#108) U10.122(VDD#122) U10.135(VDD#135) U11.2(VCCA) U14.6(VCC) U30.4(OUT) U30.5(SENSE/ADJ)
VCC_5V: C56.1 C57.1 C79.1 C80.1 C85.1 C88.1 C96.1 C97.1 C106.1 C107.1 C108.1 C109.1 C110.1 C111.1 C123.1 C124.1 C135.1 C136.1 C138.1 C139.1 D24.2(K) D32.2(K) L10.1 L11.2 L12.1 R38.2 R41.2 R43.2 R46.2 R49.2 R51.2 R90.1 R100.2 R108.1 R111.1 R113.1 R127.1 R129.1 R130.2 R132.1 R133.2 R135.2 R136.2 R146.1 R147.1 R148.1 R149.1 R150.1 R151.1 R152.1 R153.1 R164.1 R165.1 R166.1 R167.2 R168.2 R169.2 U11.15(VCCB) U16.2(VCC#2) U16.8(VCC#8) U17.4(COLLECTOR) U21.4(COLLECTOR) U25.4(COLLECTOR) U27.2(VCC#2) U27.8(VCC#8) U30.1(S\H\D\N\) U30.2(IN) U31.4(V+) U33.4(COLLECTOR) U38.3(VCC) U41.4(COLLECTOR) U45.8(VCC) U47.6 U59.8(VCC)
VCC_24V: C119.1 C120.1 D29.2(K) Q1.2(D) Q3.2(D) Q5.2(D) Q7.2(D) Q9.2(D) R71.2 R84.2 R99.2 R110.2 R119.1 R125.2 U36.4(V+)
VDDA: C59.1 C60.1 L5.1 L6.2 U10.31(VDDA)
VDDA_3V3: C10.1 C11.2 L1.1 U3.3(VDDA_3V3)
VSSA: C59.2 C60.2 C62.1 L7.2 L8.1 U10.34(VSSA)
32KHZ_EXTL: C75.2 R67.2 R68.1 Y2.2
32KHZ_XTL: C67.2 R65.1 R67.1 Y2.1
50MHZ_OSC: U3.9(XI/REFCLK) U10.72(PTA18) Y1.3(CLKOUT)
A_1: R1.1 U2.13(Y) U2.18(A)
A_2: R20.1 U7.13(Y) U7.18(A)
A_3: R73.1 U16.13(Y) U16.18(A)
A_4: R91.1 U27.13(Y) U27.18(A)
AD0: C121.1 C122.1 R107.1 U22.67(PAD00/AN00)
AD1: C134.1 R122.1 R128.2 U22.69(PAD01/AN01)
AD2: U22.71(PAD02/AN02)
AD3: R115.1 U22.73(PAD03/AN03)
AD4: R87.1 U22.75(PAD04/AN04)
AD5: U22.77(PAD05/AN05)
AD6: U22.79(PAD06/AN06)
AD7: U22.81(PAD07/AN07)
AD8: C127.1 C128.1 R118.1 U22.68(PAD08/AN08)
AD9: C137.1 R143.1 R144.2 U22.70(PAD09/AN09)
AD10: R139.1 U22.72(PAD10/AN10)
AD11: R104.1 U22.74(PAD11/AN11)
AD12: R75.1 U22.76(PAD12/AN12)
AD13: U22.78(PAD13/AN13)
AD14: U22.80(PAD14/AN14)
AD15: U22.82(PAD15/AN15)
B_1: R4.1 U2.15(Z) U2.17(B)
B_2: R22.1 U7.15(Z) U7.17(B)
B_3: R76.1 U16.15(Z) U16.17(B)
B_4: R94.1 U27.15(Z) U27.17(B)
CLK_K60: R45.2 U10.141(PTD12) U11.5(A4)
EXTAL32_RTC: R68.2 U10.41(EXTAL32)
I2C0_SCL: R111.2 U22.29(PB5) U38.1(SCL)
I2C0_SDA: R108.2 U22.30(PB6) U38.16(SDA)
I2C1_SCL: P2.3 R58.2 U10.115(PTC10)
I2C1_SDA: P2.4 R60.2 U10.116(PTC11)
L: J8.1 U31.1(L) U36.1(L)
LED0/NWAYEN: R34.2 U3.30(LED0/NWAYEN)
LED1/SPEED: R26.2 U3.31(LED1/SPEED)
MISO0_XS128: R51.1 U11.10(B6) U22.93(PS4)
MISO_K60: R50.2 U10.143(PTD14) U11.7(A6)
MODC: R135.1 R140.1 U22.23(MODC/BKGD)
MOSI0_XS128: R49.1 U11.11(B5) U22.94(PS5)
MOSI_K60: R48.2 U10.142(PTD13) U11.6(A5)
N: J8.2 U31.2(N) U36.2(N)
PA0: C125.1 C126.1 R114.1 R163.2 U22.57(PA0) U41.3(EMITTER)
PA1: C117.1 C118.1 R106.1 R162.2 U22.58(PA1) U33.3(EMITTER)
PA2: C102.1 C103.1 R98.1 R161.2 U22.59(PA2) U25.3(EMITTER)
PA3: C92.1 C93.1 R83.1 R160.2 U21.3(EMITTER) U22.60(PA3)
PA4: C83.1 C84.1 R77.1 R159.2 U17.3(EMITTER) U22.61(PA4)
PA5: U22.62(PA5)
PA6: U22.63(PA6)
PA7: U22.64(PA7)
PB0: U22.24(PB0)
PB1: U22.25(PB1)
PB2: U22.26(PB2)
PB3: U22.27(PB3)
PB4: U22.28(PB4)
PB7: U22.31(PB7)
PCS0_K60: R42.2 U10.140(PTD11) U11.4(A3)
PE0: R150.2 U22.56(PE0) U55.1
PE1: R151.2 U22.55(PE1) U56.1
PE2: R152.2 U22.54(PE2) U57.1
PE3: R153.2 U22.53(PE3) U58.1
PE4: R145.1 U22.39(PE4/ECLK)
PE5: R142.1 U22.38(PE5)
PE6: R141.1 U22.37(PE6)
PE7: R138.1 U22.36(PE7)
PH0: R146.2 U22.52(PH0) U51.1
PH1: R147.2 U22.51(PH1) U52.1
PH2: R148.2 U22.50(PH2) U53.1
PH3: R149.2 U22.49(PH3) U54.1
PH4: R137.1 U22.35(PH4)
PH5: R131.1 U22.34(PH5)
PH6: R123.1 U22.33(PH6)
PH7: R121.1 U22.32(PH7)
PJ0: U22.22(PJ0)
PJ1: U22.21(PJ1)
PJ6: R38.1 U11.16(B1) U22.99(PJ6)
PJ7: R41.1 U11.14(B2) U22.98(PJ7)
PK0: U22.8(PK0)
PK1: U22.7(PK1)
PK2: U22.6(PK2)
PK3: U22.5(PK3)
PK4: U22.20(PK4)
PK5: U22.19(PK5)
PK7: U22.108(PK7)
PM0: R127.2 U22.105(PM0) U45.1(C\S\)
PM1: R133.1 U22.104(PM1) U45.6(SCK)
PM2: R129.2 U22.103(PM2) U45.2(SO)
PM3: R136.1 U22.102(PM3) U45.5(SI)
PM4: R130.1 U22.101(PM4) U45.7(H\O\L\D\)
PM5: R132.2 U22.100(PM5) U45.3(W\P\)
PM6: R78.1 U22.88(PM6)
PM7: R96.1 U22.87(PM7)
PP0: U22.4(PWM0/PP0)
PP1: U22.3(PWM1/PP1)
PP2: U22.2(PP2)
PP3: U22.1(PP3)
PP4: U22.112(PP4)
PP5: U22.111(PP5)
PP6: U22.110(PP6)
PP7: U22.109(PP7)
PS0: R74.1 U22.89(PS0/RXD0)
PS1: R79.1 U22.90(PS1/TXD0)
PS2: R88.1 U22.91(PS2/RXD1)
PS3: R97.1 U22.92(PS3/TXD1)
PS6: R46.1 U11.12(B4) U22.95(PS6)
PS7: R43.1 U11.13(B3) U22.96(PS7)
PT0: R164.2 U22.9(IOC0/PT0) U59.1(C\S\)
PT1: R165.2 U22.10(IOC1/PT1) U59.2(SO)
PT2: R166.2 U22.11(IOC2/PT2) U59.3(W\P\)
PT3: R169.1 U22.12(IOC3/PT3) U59.5(SI)
PT4: R167.1 U22.15(IOC4/PT4) U59.6(SCK)
PT5: R168.1 U22.16(PT5) U59.7(H\O\L\D\)
PT6: U22.17(PT6)
PT7: U22.18(IOC7/PT7)
PTA0: P1.4 U10.50(PTA0)
PTA1: P1.8 U10.51(PTA1)
PTA2: P1.6 U10.52(PTA2)
PTA3: P1.2 U10.53(PTA3)
PTA4: U10.54(PTA4)
PTA5: R7.2 U10.55(PTA5)
PTA6: U10.58(PTA6)
PTA7: U10.59(PTA7)
PTA8: R54.1 U10.60(PTA8)
PTA9: R55.1 U10.61(PTA9)
PTA10: R44.1 U10.62(PTA10)
PTA11: R53.1 U10.63(PTA11)
PTA12: R16.1 U10.64(PTA12)
PTA13: R17.1 U10.65(PTA13)
PTA14: R6.2 R8.1 U10.66(PTA14)
PTA15: U3.23(TXEN/TX_EN) U10.67(PTA15)
PTA16: U3.24(TXDO/TXD[0]) U10.68(PTA16)
PTA17: U3.25(TXD1/TXD[1]) U10.69(PTA17)
PTA19: R36.2 U10.73(PTA19) U12.1
PTA24: U3.21(INTRP) U10.75(PTA24)
PTA25: U10.76(PTA25)
PTA26: U10.77(PTA26)
PTA27: U10.78(PTA27)
PTA28: U10.79(PTA28)
PTA29: U10.80(PTA29)
PTB0: R11.2 U3.11(MDIO) U10.81(PTB0)
PTB1: U3.12(MDC) U10.82(PTB1)
PTB2: U10.83(PTB2)
PTB3: U10.84(PTB3)
PTB4: U10.85(PTB4)
PTB5: U10.86(PTB5)
PTB6: U10.87(PTB6)
PTB7: U10.88(PTB7)
PTB8: U10.89(PTB8)
PTB9: U10.90(PTB9)
PTB10: U10.91(PTB10)
PTB11: U10.92(PTB11)
PTB16: U10.95(PTB16)
PTB17: U10.96(PTB17)
PTB18: U10.97(PTB18)
PTB19: U10.98(PTB19)
PTB20: U10.99(PTB20)
PTB21: U10.100(PTB21)
PTB22: U10.101(PTB22)
PTB23: U10.102(PTB23)
PTC0: U10.103(PTC0)
PTC1: U10.104(PTC1)
PTC2: U10.105(PTC2)
PTC3: R19.1 U5.12(R1OUT) U10.106(PTC3)
PTC4: R15.1 U5.11(T1IN) U10.109(PTC4)
PTC5: U10.110(PTC5)
PTC6: U10.111(PTC6)
PTC7: U10.112(PTC7)
PTC8: U10.113(PTC8)
PTC9: U10.114(PTC9)
PTC12: U10.117(PTC12)
PTC13: U10.118(PTC13)
PTC14: U10.119(PTC14)
PTC15: U10.120(PTC15)
PTC16: R29.1 U9.12(R1OUT) U10.123(PTC16)
PTC17: R30.1 U9.11(T1IN) U10.124(PTC17)
PTC18: R35.1 U9.10(T2IN) U10.125(PTC18)
PTC19: R47.1 U9.9(R2OUT) U10.126(PTC19)
PTD0: U10.127(PTD0)
PTD1: U10.128(PTD1)
PTD2: U10.129(PTD2)
PTD3: U10.130(PTD3)
PTD4: U10.131(PTD4)
PTD5: U10.132(PTD5)
PTD6: U10.133(PTD6)
PTD7: U10.136(PTD7)
PTD8: U10.137(PTD8)
PTD9: R37.2 U10.138(PTD9) U11.1(A1)
PTD10: R39.2 U10.139(PTD10) U11.3(A2)
PTD15: R52.2 U10.144(PTD15) U11.8(OE)
PTE0: U10.1(PTE0)
PTE1: R56.2 U10.2(PTE1) U14.8(SO)
PTE2: R59.2 U10.3(PTE2) U14.2(SCK)
PTE3: R57.2 U10.4(PTE3) U14.1(SI)
PTE4: R62.2 U10.7(PTE4) U14.4(C\S\)
PTE5: R61.2 U10.8(PTE5) U14.3(R\E\S\E\T\)
PTE6: R63.1 U10.9(PTE6) U14.5(W\P\)
PTE7: U10.10(PTE7)
PTE8: R5.1 U10.11(PTE8)
PTE9: R2.1 U10.12(PTE9)
PTE10: R3.1 U10.13(PTE10)
PTE11: U10.14(PTE11)
PTE12: U10.15(PTE12)
PTE24: R24.1 U10.45(PTE24)
PTE25: R21.1 U10.46(PTE25)
PTE26: R40.2 U10.47(PTE26) U13.1
PTE27: R23.1 U10.48(PTE27)
PTE28: U10.49(PTE28)
RESET_K60: C74.2 D5.1(C) D17.1(A) D18.2(CATHODE) P1.10 R64.1 R66.2 U10.74(RESET_B)
RS232_CTS: J4.7 U9.8(R2IN)
RS232_RTS: J4.8 U9.7(T2OUT)
RS232_RXD: J4.3 U9.13(R1IN)
RS232_TXD: J4.2 U9.14(T1OUT)
RST: C129.2 D32.1(A) R113.2 R116.2 U22.42(RESET) U47.4
RX1: R2.2 R9.1 U2.4(RXD)
RX2: R21.2 R25.1 U7.4(RXD)
RX3: R74.2 R82.1 U16.4(RXD)
RX4: R88.2 R103.1 U27.4(RXD)
RX+: J5.7(RD+) R32.2 U3.5(RX+) U6.4(6)
RX-: J5.8(RD-) R27.2 U3.4(RX-) U6.3
TRIM_5V: R92.2 R93.2 U31.6(TRIM)
TRIM_24V: R120.2 R124.2 U36.6(TRIM)
TX1: R5.2 R14.1 U2.7(TXD)
TX2: R24.2 R31.1 U7.7(TXD)
TX3: R79.2 R85.1 U16.7(TXD)
TX4: R97.2 R105.1 U27.7(TXD)
TX+: J5.1(TD+) R33.2 U3.7(TX+) U6.6(4)
TX-: J5.2(TD-) R28.2 U3.6(TX-) U6.1
VISO_1: C1.1 C2.1 C14.1 C15.1 U2.12(VISOOUT) U2.19(VISOIN)
VISO_2: C26.1 C27.1 C36.1 C37.1 U7.12(VISOOUT) U7.19(VISOIN)
VISO_3: C81.1 C82.1 C86.1 C87.1 U16.12(VISOOUT) U16.19(VISOIN)
VISO_4: C98.1 C99.1 C104.1 C105.1 U27.12(VISOOUT) U27.19(VISOIN)
VREF_OUT: C62.2 U10.37(VREF_OUT)
VREFH: C58.1 C61.1 L6.1 U10.32(VREFH)
VREFL: C58.2 C61.2 L7.1 U10.33(VREFL)
VRH: R80.1 U22.84(VRH)
XTAL32_RTC: R65.2 U10.40(XTAL22)
~GND: J8.3 U31.3(~GND) U36.3(~GND)
N16781720: C12.2 C13.1 U3.2(VDDPLL_1V8)
N16782615: C35.1 J5.3(CT-T) J5.6(CT-R) L3.2
N16782623: C48.1 R27.1 R32.1
N16782674: J5.10(RLEDK) R26.1
N16782792: C49.1 R28.1 R33.1
N16782827: J5.11(LLEDK) R34.1
N16783190: C20.1 R10.2 U3.10(REXT)
N16783726: R16.2 U3.15(RXD1/RXD[1]/PHYAD2)
N16783729: R17.2 U3.16(RXD0/RXD[0]/DUPLEX)
N16783833: C23.1 D5.2(A) D6.2(A) R18.1 U3.32(RST#)
N16784306: R13.1 U3.29(CRS/CONFIG1)
N16784869: R6.1 U3.18(RXDV/CRSDV/CONFIG2)
N16784889: R7.1 U3.20(RXER/RX_ER/ISO)
N16903553: J1.2 R4.2 U4.1
N16903555: J3.2 R22.2 U8.1
N16903594: J2.3 U1.2 U5.13(R1IN)
N16903596: J2.2 U1.1 U5.14(T1OUT)
N16903608: C18.1 U5.1(C1+)
N16903614: C18.2 U5.3(C1-)
N16903616: C19.1 U5.4(C2+)
N16903618: C19.2 U5.5(C2-)
N16903723: C21.1 U5.2(V+)
N16903727: C22.1 U5.6(V-)
N16903765: J2.M1 J2.M2 L2.1
N16904637: R3.2 U2.5(R\E\) U2.6(DE)
N16904676: J1.1 R1.2 U4.2
N16904937: C40.1 U9.1(C1+)
N16904943: C40.2 U9.3(C1-)
N16904945: C41.1 U9.4(C2+)
N16904947: C41.2 U9.5(C2-)
N16905038: C42.1 U9.2(V+)
N16905042: C43.1 U9.6(V-)
N16905078: J4.M1 J4.M2 L4.1
N16905221: R23.2 U7.5(R\E\) U7.6(DE)
N16905285: J3.1 R20.2 U8.2
N16908797: J6.2 R76.2 U19.1
N16908807: J7.2 R94.2 U29.1
N16908844: D19.2(K) R70.2 U17.1(ANODE)
N16908848: D19.1(A) U15.1 U17.2(CATHODE)
N16909236: C83.2 C84.2 D49.2(CATHODE)
N16909251: D34.1(ANODE) R121.2
N16909257: D20.2(K) R81.2 U21.1(ANODE)
N16909261: D20.1(A) U21.2(CATHODE) U23.1
N16909306: C92.2 C93.2 D50.2(CATHODE)
N16909342: R81.1 U23.2
N16909360: R71.1 R72.2 U18.4(COLLECTOR)
N16909375: D35.1(ANODE) R123.2
N16909405: R75.2 U18.1(ANODE)
N16909412: D23.1(A) U25.2(CATHODE) U28.1
N16909414: D23.2(K) R89.2 U25.1(ANODE)
N16909426: D37.1(ANODE) R131.2
N16909474: C102.2 C103.2 D51.2(CATHODE)
N16909510: R89.1 U28.2
N16909546: D38.1(ANODE) R137.2
N16909579: D39.1(ANODE) R138.2
N16909598: D40.1(ANODE) R141.2
N16909611: D26.1(A) U32.1 U33.2(CATHODE)
N16909613: D26.2(K) R102.2 U33.1(ANODE)
N16909627: D41.1(ANODE) R142.2
N16909671: C117.2 C118.2 D52.2(CATHODE)
N16909697: Q1.3(S) Q2.3(D) R154.2 U20.1
N16909711: R102.1 U32.2
N16909747: D43.1(ANODE) R145.2
N16909767: D31.2(K) R109.2 U41.1(ANODE)
N16909771: D31.1(A) U39.1 U41.2(CATHODE)
N16909807: C125.2 C126.2 D53.2(CATHODE)
N16909840: R109.1 U39.2
N16909878: D30.2(K) R107.2 U37.1
N16909922: D33.2(K) R118.2 U43.1
N16909988: D36.2(K) R122.2 U46.1
N16910032: D42.2(K) R143.2 U49.1
N16910167: Q1.1(G) Q2.1(G) R72.1
N16910202: R84.1 R86.2 U24.4(COLLECTOR)
N16910212: R87.2 U24.1(ANODE)
N16910230: Q3.3(S) Q4.3(D) R155.2 U26.1
N16910285: Q3.1(G) Q4.1(G) R86.1
N16910301: R70.1 U15.2
N16910317: R99.1 R101.2 U34.4(COLLECTOR)
N16910349: Q5.3(S) Q6.3(D) R156.2 U35.1
N16910403: Q5.1(G) Q6.1(G) R101.1
N16910466: R78.2 U16.5(R\E\) U16.6(DE)
N16910514: J6.1 R73.2 U19.2
N16910545: R110.1 R112.2 U42.4(COLLECTOR)
N16910547: R115.2 U42.1(ANODE)
N16910620: Q7.3(S) Q8.3(D) R157.2 U44.1
N16910714: Q7.1(G) Q8.1(G) R112.1
N16910900: R139.2 U48.1(ANODE)
N16910902: R125.1 R134.2 U48.4(COLLECTOR)
N16910926: Q9.3(S) Q10.3(D) R158.2 U50.1
N16910978: Q9.1(G) Q10.1(G) R134.1
N16911043: R96.2 U27.5(R\E\) U27.6(DE)
N16911092: J7.1 R91.2 U29.2
N16913363: R116.1 SW2.2
N16913511: C100.1 C101.1 U22.65(VDD)
N16913540: C89.1 C90.1 C91.1 L11.1 R80.2 U22.83(VDDA)
N16913624: C114.1 C115.1 C116.1 L12.2 U22.41(VDDX2) U22.43(VDDR)
N16913635: C130.1 R117.1 U22.46(EXTAL) Y3.1
N16913637: C132.1 R117.2 U22.47(XTAL) Y3.2
N16913639: C131.1 C133.1 U22.48(VDDPLL)
N16913691: C76.1 C77.1 C78.1 L10.2 U22.107(VDDX1)
N16913850: C94.1 C95.1 U22.13(VDDF)
N16914079: R140.2 U47.3
N16914236: D27.1(ANODE) R100.1
N16916388: R66.1 SW1.2
N16916545: C65.1 C66.1 L9.1 Y1.4(VDD)
N16917503: D18.1(ANODE) R69.2
N16939289: R90.2 R92.1 R95.1
N16941586: R119.2 R120.1 R126.1
N16964948: R104.2 U34.1(ANODE)
N16973711: D45.1(ANODE) R155.1
N16973769: D46.1(ANODE) R156.1
N16973791: D47.1(ANODE) R157.1
N16973823: D48.1(ANODE) R158.1
N16976524: D49.1(ANODE) R159.1
N16976601: D50.1(ANODE) R160.1
N16976624: D51.1(ANODE) R161.1
N16976684: D52.1(ANODE) R162.1
N16976708: D53.1(ANODE) R163.1
N169041280: D3.1(ANODE) R15.2
N169041460: D4.1(ANODE) R19.2
N169041950: D14.1(ANODE) R53.2
N169042100: D15.1(ANODE) R54.2
N169042360: D16.1(ANODE) R55.2
N169042920: D12.1(ANODE) R44.2
N169048960: D1.1(ANODE) R9.2
N169049120: D2.1(ANODE) R14.2
N169051450: D8.1(ANODE) R29.2
N169051610: D9.1(ANODE) R30.2
N169054920: D11.1(ANODE) R35.2
N169055260: D13.1(ANODE) R47.2
N169055580: D7.1(ANODE) R25.2
N169055680: D10.1(ANODE) R31.2
N169108680: D21.1(ANODE) R82.2
N169108761: D22.1(ANODE) R85.2
N169113400: D25.1(ANODE) R103.2
N169113510: D28.1(ANODE) R105.2
N169733640: D44.1(ANODE) R154.1
N1678140027: R12.1 U3.28(COL/CONFIG0)

Pads without a net: J2 1 4 6 7 8 9; J4 1 4 6 9; P1 7 9; U3 8 13 14 19 22 26 27; U5 7 8 9 10; U6 5; U10 19 20 21 22 23 24 25 26 27 28 29 30 35 36 38 39; U12 4; U13 4; U38 2 4 5 6 7 8 9 10 11 12 13; U47 1 5; U51 4; U52 4; U53 4; U54 4; U55 4; U56 4; U57 4; U58 4; Y1 1

## Via types
v1: diameter 0.55, hole 0.3, TOP to BOTTOM, 235 vias
v2: diameter 1.05, hole 0.6, TOP to BOTTOM, 147 vias
v3: diameter 0.9, hole 0.5, TOP to BOTTOM, 71 vias
v4: diameter 0.65, hole 0.4, TOP to BOTTOM, 24 vias

## Routing (per net, layer and track width the routed paths; a pad name or vN(x,y) marks a point on that pad's centre or on a via; arc(x,y) is an arc through that point)
GND: length 877
  TOP w0.203: C52.2 C53.2 124.27,78.9 125.88,77.29 ; D2.2 119.95,26.67 120.42,26.67 121.18,27.43 v1(122.05,27.43) ; C113.2 97.89,53.02 98.7,53.83 98.7,53.93 99.15,54.38 C65.2 ; U10.44 116.58,69.56 v1(116.71,69.7) ; R13.2 97.74,31.75 96.04,30.05 v3(96.04,28.17) ; C139.2 v2(180.26,45.21) ; 125.88,77.29 125.91,77.29 126.35,76.85 U10.17 ; 125.88,77.29 125.85,77.26 U10.18 v2(125.85,72.84) ; 208.15,41.49 v3(208.15,43.74) ; D10.2 137.07,26.48 138,27.41 v1(138.71,27.41) ; C64.2 C63.2 ; C34.2 C33.2 C32.2 64.2,26.02 64.9,25.32 U9.15 ; C66.2 107.66,54.38 C69.2 C68.2 111.98,55.69 112.35,56.06 U10.71 ; D22.2 153.74,26.74 154.43,27.43 v1(155.42,27.43) ; D28.2 170.12,26.48 171.12,27.48 v1(172.03,27.48) ; C20.2 R10.1 ; C17.2 v2(121.21,36.58) ; U3.1 103.63,35.08 103.62,35.09 103.34,35.09 v2(101.6,36.83) ; U10.134 138.46,68.06 138.66,67.86 138.66,67.11 139.41,66.36 C30.2 C31.2 ; v4(183.54,56.24) 184.1,56.8 U22.14 ; U22.40 v4(193.04,66.93) ; U10.57 113.15,63.06 v1(112.65,62.56) ; v3(176.38,76.02) 175.72,76.68 U22.86 ; C101.2 C100.2 187.35,81.24 U22.66 ; C43.2 v1(74.17,15.75)
  TOP w0.254: U10.93 126.85,51.6 C44.2 ; v2(125.72,50.43) 125.72,48.59 C45.2 ; U10.121 138.67,61.56 139.46,60.77 C29.2 C28.2 ; C8.2 C9.2 C7.2 25.59,25.92 26.03,25.48 26.03,23.74 ; v2(176.61,65.28) 176.5,65.18 176.5,63.86 176.33,63.68 U22.106 ; U10.107 133.85,51.38 C50.2 ; U22.97 176.24,69.53 176.53,69.24 176.53,68.27 176.58,68.22 v2(176.58,67.44) ; U22.44 v4(192.08,69.53) ; U10.6 131.85,72.67 v1(131.57,72.39) ; U22.85 176.37,77.33 v3(176.48,77.22) ; U22.45 v4(192.84,70.18)
  TOP w0.381: C135.2 157.2,57.31 U45.4 ; U59.4 180.52,46.52 180.27,46.28 C139.2
  TOP w0.508: U2.1 133.99,32.26 135.32,33.59 C4.2 C3.2 ; R128.1 C134.2 209.23,13.81 210.82,12.22 D36.1 210.82,6.66 U46.2 ; U43.2 224.79,6.66 D33.1 224.79,12.19 223.2,13.78 C128.2 C127.2 ; D30.1 237.49,11.91 235.9,13.5 C122.2 C121.2 ; C39.2 C38.2 151.57,33.69 150.5,32.61 U7.1 ; C107.2 C106.2 184.85,33.74 183.51,32.41 U27.1 ; R144.1 C137.2 196.53,13.91 198.12,12.32 D42.1 198.12,6.66 U49.2 ; U2.10 122.55,31.98 121.22,33.31 C16.2 C17.2 ; C24.2 C25.2 137.99,33.64 139.06,32.56 139.06,31.2 ; C64.2 143.04,83.75 142.34,83.06 U14.7 ; C80.2 C79.2 154.24,33.94 155.37,32.82 155.37,31.4 U16.10 ; C97.2 C96.2 171.01,34.02 172.08,32.94 U27.10 ; U16.1 167,32.51 168.34,33.84 C88.2 C85.2
  TOP w0.635: U30.3 86.36,51.05 86.42,51.1 86.42,52.03 86.36,52.09 U30.6
  TOP w0.762: U24.2 v2(116.95,98.82) ; U42.2 v2(142.51,98.82) ; U2.1 133.99,29.44 133.52,28.98 131.98,28.98 131.44,29.51 U2.3 ; U7.3 147.95,29.97 149,28.93 149.82,28.93 150.5,29.6 U7.1 ; U48.2 v2(155.05,98.82) ; U16.9 U16.10 ; U27.3 180.98,30.02 182.04,28.96 182.87,28.96 183.51,29.6 U27.1 ; U2.9 U2.10 ; 139.06,31.2 U7.9 ; U16.3 164.46,29.9 165.47,28.89 166.29,28.89 167,29.6 U16.1 ; U27.9 U27.10 ; U34.2 v2(129.53,98.82) ; U18.2 v2(103.87,98.82)
  TOP w1.27: C111.2 78.27,51.75 C110.2 79.26,52.22 U30.6 ; 85.99,59.69 v2(85.6,59.69) v2(83.06,59.69) D24.1 78.59,59.84 C108.2 75.73,59.37 C109.2
  TOP w3.81: U31.5 81.43,64.25 U30.6
  GND w0.508: 47.65,20.93 v1(47.65,21.39) ; v1(47.65,21.39) 47.2,21.39 ; v1(47.65,21.39) 48.1,21.39 ; v1(47.65,21.39) 47.65,21.84 ; 62.69,10.41 J4.5 ; J4.5 61.67,11.43 ; J4.5 62.69,12.45 ; J4.5 63.7,11.43 ; v2(140.45,66.31) 141.15,66.31 ; v2(140.45,66.31) 140.45,67.01 ; v2(140.45,66.31) 139.75,66.31 ; v2(140.45,66.31) 140.45,65.61 ; 96.78,53.41 v4(97.28,53.41) ; v4(97.28,53.41) 97.28,53.91 ; v4(97.28,53.41) 97.28,52.9 ; v4(97.28,53.41) 97.78,53.41 ; v3(173.56,88.14) 173.56,88.77 ; v3(173.56,88.14) 173.56,87.51 ; v3(173.56,88.14) 174.19,88.14 ; v3(173.56,88.14) 172.93,88.14 ; 100.6,20.32 J5.5 ; J5.5 101.6,19.32 ; J5.5 101.6,21.32 ; J5.5 102.6,20.32 ; 234.41,75.24 U57.2 ; U57.2 235.29,74.37 ; U57.2 235.29,76.12 ; U57.2 236.16,75.24 ; 101.87,17.78 J5.4 ; J5.4 102.87,16.78 ; J5.4 103.87,17.78 ; J5.4 102.87,18.78 ; 89.98,57.15 v2(90.68,57.15) ; v2(90.68,57.15) 91.38,57.15 ; v2(90.68,57.15) 90.68,57.85 ; v2(90.68,57.15) 90.68,56.45 ; v3(109.41,6.6) 110.04,6.6 ; v3(109.41,6.6) 108.78,6.6 ; v3(109.41,6.6) 109.41,5.98 ; v3(109.41,6.6) 109.41,7.23 ; v3(224.24,59.02) 224.24,59.65 ; v3(224.24,59.02) 223.61,59.02 ; v3(224.24,59.02) 224.87,59.02 ; v3(224.24,59.02) 224.24,58.39 ; U52.2 236.14,52.36 ; U52.2 235.26,51.48 ; U52.2 235.26,53.24 ; U52.2 234.38,52.36 ; 125.15,72.84 v2(125.85,72.84) 125.85,72.14 ; 125.01,50.43 v2(125.72,50.43) ; v2(125.72,50.43) 126.42,50.43 ; v2(125.72,50.43) 125.72,49.73 ; v2(125.72,50.43) 125.72,51.14 ; v1(103.23,73.63) 103.68,73.63 ; v1(103.23,73.63) 102.77,73.63 ; v1(103.23,73.63) 103.23,74.09 ; v1(103.23,73.63) 103.23,73.18 ; v2(156.97,57.15) 156.97,57.85 ; v2(156.97,57.15) 156.97,56.45 ; v2(156.97,57.15) 156.27,57.15 ; v2(156.97,57.15) 157.67,57.15 ; U55.3 243.14,90.46 ; U55.3 242.26,89.58 ; U55.3 241.38,90.46 ; U55.3 242.26,91.34 ; v1(131.57,72.39) 132.02,72.39 ; v1(131.57,72.39) 131.57,72.84 ; v1(131.57,72.39) 131.57,71.94 ; v1(131.57,72.39) 131.12,72.39 ; 112.2,62.56 v1(112.65,62.56) ; v1(112.65,62.56) 112.65,62.11 ; v1(112.65,62.56) 113.1,62.56 ; 208.15,43.11 v3(208.15,43.74) ; v3(208.15,43.74) 208.78,43.74 ; v3(208.15,43.74) 207.53,43.74 ; v3(208.15,43.74) 208.15,44.37 ; v3(111.62,38.09) 111.62,38.72 ; v3(111.62,38.09) 112.25,38.09 ; v3(111.62,38.09) 111.62,37.46 ; v3(111.62,38.09) 110.99,38.09 ; 37.39,21.34 v1(37.85,21.34) ; v1(37.85,21.34) 37.85,21.79 ; v1(37.85,21.34) 38.3,21.34 ; v1(37.85,21.34) 37.85,20.88 ; 85.6,61.53 v2(85.6,62.23) ; v2(85.6,62.23) 84.9,62.23 ; v2(85.6,62.23) 86.3,62.23 ; v2(85.6,62.23) 85.6,62.93 ; v3(114.09,79.03) 114.09,79.66 ; v3(114.09,79.03) 113.46,79.03 ; v3(114.09,79.03) 114.71,79.03 ; v3(114.09,79.03) 114.09,78.41 ; 244.69,11.4 v2(245.39,11.4) ; v2(245.39,11.4) 245.39,12.11 ; v2(245.39,11.4) 245.39,10.7 ; v2(245.39,11.4) 246.09,11.4 ; U57.3 242.29,76.12 ; U57.3 243.16,75.24 ; U57.3 241.41,75.24 ; U57.3 242.29,74.37 ; U47.2 239.52,26.84 ; U47.2 240.45,25.91 ; U47.2 238.59,25.91 ; U47.2 239.52,24.98 ; U12.2 93.02,83.72 ; U12.2 93.9,82.84 ; U12.2 93.02,81.96 ; U12.2 92.14,82.84 ; 192.33,70.18 v4(192.84,70.18) ; v4(192.84,70.18) 193.34,70.18 ; v4(192.84,70.18) 192.84,70.68 ; v4(192.84,70.18) 192.84,69.68 ; 131.25,70.36 v1(131.7,70.36) ; v1(131.7,70.36) 132.15,70.36 ; v1(131.7,70.36) 131.7,69.91 ; v1(131.7,70.36) 131.7,70.81 ; 125.72,47.83 v2(125.72,48.53) ; v2(125.72,48.53) 126.42,48.53 ; v2(125.72,48.53) 125.01,48.53 ; v2(125.72,48.53) 125.72,49.23 ; 63.81,30.48 v1(64.26,30.48) ; v1(64.26,30.48) 64.26,30.03 ; v1(64.26,30.48) 64.26,30.93 ; v1(64.26,30.48) 64.71,30.48 ; v3(208.72,68.52) 209.35,68.52 ; v3(208.72,68.52) 208.1,68.52 ; v3(208.72,68.52) 208.72,67.89 ; v3(208.72,68.52) 208.72,69.15 ; J5.CG1 110.11,15.72 ; J5.CG1 111.35,14.48 ; J5.CG1 108.86,14.48 ; J5.CG1 110.11,13.23 ; v2(143.99,83.79) 144.69,83.79 ; v2(143.99,83.79) 143.29,83.79 ; v2(143.99,83.79) 143.99,84.49 ; v2(143.99,83.79) 143.99,83.09 ; 104.85,43.52 v4(104.85,44.02) ; v4(104.85,44.02) 104.35,44.02 ; v4(104.85,44.02) 104.85,44.52 ; v4(104.85,44.02) 105.35,44.02 ; 175.9,65.28 v2(176.61,65.28) ; v2(176.61,65.28) 176.61,64.58 ; v2(176.61,65.28) 176.61,65.98 ; v2(176.61,65.28) 177.31,65.28 ; U58.3 242.26,68.48 ; U58.3 243.14,67.6 ; U58.3 241.38,67.6 ; U58.3 242.26,66.72 ; v2(100.53,37.9) 100.53,38.6 ; v2(100.53,37.9) 100.53,37.19 ; v2(100.53,37.9) 101.24,37.9 ; v2(100.53,37.9) 99.83,37.9 ; 40.95,3.81 v1(41.4,3.81) ; v1(41.4,3.81) 41.4,4.26 ; v1(41.4,3.81) 41.85,3.81 ; v1(41.4,3.81) 41.4,3.36 ; 245.36,27.21 v1(245.36,27.66) ; v1(245.36,27.66) 245.82,27.66 ; v1(245.36,27.66) 245.36,28.11 ; v1(245.36,27.66) 244.91,27.66 ; 115.39,29.5 v3(116.01,29.5) ; v3(116.01,29.5) 116.01,28.87 ; v3(116.01,29.5) 116.64,29.5 ; v3(116.01,29.5) 116.01,30.13 ; v2(129.53,98.82) 129.53,99.52 ; v2(129.53,98.82) 130.23,98.82 ; v2(129.53,98.82) 128.82,98.82 ; v2(129.53,98.82) 129.53,98.12 ; U13.3 111.45,83.72 ; U13.3 111.45,81.96 ; U13.3 112.33,82.84 ; U13.3 110.57,82.84 ; 225.03,103.45 v2(225.03,104.15) ; v2(225.03,104.15) 224.33,104.15 ; v2(225.03,104.15) 225.73,104.15 ; v2(225.03,104.15) 225.03,104.86 ; v1(83.06,18.54) 83.06,18.99 ; v1(83.06,18.54) 82.61,18.54 ; v1(83.06,18.54) 83.06,18.09 ; v1(83.06,18.54) 83.51,18.54 ; v1(83.06,20.83) 83.06,21.28 ; v1(83.06,20.83) 83.51,20.83 ; v1(83.06,20.83) 82.61,20.83 ; v1(83.06,20.83) 83.06,20.38 ; 150.99,36.58 v2(151.69,36.58) ; v2(151.69,36.58) 151.69,35.87 ; v2(151.69,36.58) 151.69,37.28 ; v2(151.69,36.58) 152.39,36.58 ; 116.25,98.82 v2(116.95,98.82) ; v2(116.95,98.82) 117.66,98.82 ; v2(116.95,98.82) 116.95,98.12 ; v2(116.95,98.82) 116.95,99.52 ; 153.16,21.92 v1(153.16,22.38) ; v1(153.16,22.38) 153.61,22.38 ; v1(153.16,22.38) 153.16,22.83 ; v1(153.16,22.38) 152.71,22.38 ; 172.93,86.11 v3(173.56,86.11) ; v3(173.56,86.11) 173.56,86.73 ; v3(173.56,86.11) 173.56,85.48 ; v3(173.56,86.11) 174.19,86.11 ; v2(142.48,66.31) 143.18,66.31 ; v2(142.48,66.31) 142.48,65.61 ; v2(142.48,66.31) 141.78,66.31 ; v2(142.48,66.31) 142.48,67.01 ; 85.6,58.99 v2(85.6,59.69) ; v2(85.6,59.69) 85.6,60.39 ; v2(85.6,59.69) 86.3,59.69 ; v2(85.6,59.69) 84.9,59.69 ; 87.44,62.23 v2(88.14,62.23) ; v2(88.14,62.23) 88.84,62.23 ; v2(88.14,62.23) 88.14,61.53 ; v2(88.14,62.23) 88.14,62.93 ; 73.72,15.75 v1(74.17,15.75) ; v1(74.17,15.75) 74.62,15.75 ; v1(74.17,15.75) 74.17,16.2 ; v1(74.17,15.75) 74.17,15.3 ; v3(96.04,28.17) 96.67,28.17 ; v3(96.04,28.17) 95.41,28.17 ; v3(96.04,28.17) 96.04,27.54 ; v3(96.04,28.17) 96.04,28.8 ; 146.63,54.54 P2.1 ; P2.1 145.76,55.42 ; P2.1 146.63,56.3 ; P2.1 147.51,55.42 ; 234.38,82.84 U56.2 ; U56.2 235.26,83.72 ; U56.2 235.26,81.96 ; U56.2 236.14,82.84 ; v2(101.6,36.83) 102.3,36.83 ; v2(101.6,36.83) 100.9,36.83 ; v2(101.6,36.83) 101.6,37.53 ; v2(101.6,36.83) 101.6,36.13 ; 172.93,84.07 v3(173.56,84.07) ; v3(173.56,84.07) 174.19,84.07 ; v3(173.56,84.07) 173.56,83.45 ; v3(173.56,84.07) 173.56,84.7 ; v2(207.06,27.18) 207.06,27.88 ; v2(207.06,27.18) 207.06,26.48 ; v2(207.06,27.18) 206.36,27.18 ; v2(207.06,27.18) 207.76,27.18 ; v1(25.65,26.42) 25.65,26.87 ; v1(25.65,26.42) 25.2,26.42 ; v1(25.65,26.42) 26.11,26.42 ; v1(25.65,26.42) 25.65,25.96 ; 93.99,53.41 v4(94.49,53.41) ; v4(94.49,53.41) 94.49,53.91 ; v4(94.49,53.41) 94.49,52.9 ; v4(94.49,53.41) 94.99,53.41 ; 84.82,80.29 P1.5 83.89,79.36 ; 176.38,75.39 v3(176.38,76.02) ; v3(176.38,76.02) 177.01,76.02 ; v3(176.38,76.02) 175.75,76.02 ; v2(176.58,61.19) 176.58,61.89 ; v2(176.58,61.19) 176.58,60.49 ; v2(176.58,61.19) 177.28,61.19 ; v2(176.58,61.19) 175.88,61.19 ; 179.44,103.45 v2(179.44,104.15) ; v2(179.44,104.15) 179.44,104.86 ; v2(179.44,104.15) 180.14,104.15 ; v2(179.44,104.15) 178.73,104.15 ; 242.26,43.86 U53.3 ; U53.3 243.14,44.74 ; U53.3 242.26,45.62 ; U53.3 241.38,44.74 ; v4(193.04,66.93) 193.54,66.93 ; v4(193.04,66.93) 192.54,66.93 ; v4(193.04,66.93) 193.04,66.43 ; v4(193.04,66.93) 193.04,67.43 ; v1(37.85,19.3) 38.3,19.3 ; v1(37.85,19.3) 37.85,18.85 ; v1(37.85,19.3) 37.39,19.3 ; v1(37.85,19.3) 37.85,19.76 ; v3(93.59,41.16) 93.59,41.79 ; v3(93.59,41.16) 92.96,41.16 ; v3(93.59,41.16) 93.59,40.53 ; v3(93.59,41.16) 94.21,41.16 ; 103.87,98.12 v2(103.87,98.82) ; v2(103.87,98.82) 104.57,98.82 ; v2(103.87,98.82) 103.17,98.82 ; v2(103.87,98.82) 103.87,99.52 ; 175.85,77.22 v3(176.48,77.22) ; v3(176.48,77.22) 176.48,77.84 ; v3(176.48,77.22) 177.11,77.22 ; 224.24,62.45 v3(224.24,63.08) ; v3(224.24,63.08) 223.61,63.08 ; v3(224.24,63.08) 224.87,63.08 ; v3(224.24,63.08) 224.24,63.71 ; 154.66,64.93 v2(154.66,65.63) ; v2(154.66,65.63) 153.96,65.63 ; v2(154.66,65.63) 154.66,66.34 ; v2(154.66,65.63) 155.36,65.63 ; v3(224.24,67.02) 224.87,67.02 ; v3(224.24,67.02) 224.24,66.39 ; v3(224.24,67.02) 223.61,67.02 ; v3(224.24,67.02) 224.24,67.65 ; 120.51,34.54 v2(121.21,34.54) ; v2(121.21,34.54) 121.21,35.25 ; v2(121.21,34.54) 121.91,34.54 ; v2(121.21,34.54) 121.21,33.84 ; U46.2 209.43,6.45 ; U46.2 208.25,5.27 ; U46.2 210.61,5.27 ; U46.2 209.43,4.09 ; U54.2 235.26,38 ; U54.2 235.26,36.24 ; U54.2 236.14,37.12 ; U54.2 234.38,37.12 ; U12.3 100.02,83.72 ; U12.3 100.02,81.96 ; U12.3 100.9,82.84 ; U12.3 99.14,82.84 ; 235.26,43.86 U53.2 ; U53.2 236.14,44.74 ; U53.2 234.38,44.74 ; U53.2 235.26,45.62 ; v3(186.72,81.89) 187.34,81.89 ; v3(186.72,81.89) 186.72,82.52 ; v3(186.72,81.89) 186.72,81.26 ; v3(186.72,81.89) 186.09,81.89 ; v2(140.45,60.72) 141.15,60.72 ; v2(140.45,60.72) 140.45,60.02 ; v2(140.45,60.72) 140.45,61.42 ; v2(140.45,60.72) 139.75,60.72 ; 137.27,34.54 v2(137.97,34.54) ; v2(137.97,34.54) 137.97,33.84 ; v2(137.97,34.54) 137.97,35.25 ; v1(83.06,22.86) 83.51,22.86 ; v1(83.06,22.86) 83.06,22.41 ; v1(83.06,22.86) 82.61,22.86 ; v1(83.06,22.86) 83.06,23.31 ; U13.2 104.45,83.72 ; U13.2 104.45,81.96 ; U13.2 105.33,82.84 ; U13.2 103.57,82.84 ; v2(154.66,67.54) 154.66,68.24 ; v2(154.66,67.54) 155.36,67.54 ; v2(154.66,67.54) 153.96,67.54 ; v2(154.66,67.54) 154.66,66.84 ; 149.12,66.84 v2(149.12,67.54) ; v2(149.12,67.54) 149.83,67.54 ; v2(149.12,67.54) 148.42,67.54 ; v2(149.12,67.54) 149.12,68.24 ; v1(92.71,76.17) 93.16,76.17 ; v1(92.71,76.17) 92.26,76.17 ; v1(92.71,76.17) 92.71,75.72 ; v1(92.71,76.17) 92.71,76.63 ; 101.6,9.79 v3(101.6,10.41) ; v3(101.6,10.41) 102.23,10.41 ; v3(101.6,10.41) 101.6,11.04 ; v3(101.6,10.41) 100.97,10.41 ; U37.2 237.28,5.27 ; U37.2 234.92,5.27 ; U37.2 236.1,6.45 ; U37.2 236.1,4.09 ; v2(207.06,29.21) 207.06,29.91 ; v2(207.06,29.21) 206.36,29.21 ; v2(207.06,29.21) 207.06,28.51 ; v2(207.06,29.21) 207.76,29.21 ; 184.71,35.87 v2(184.71,36.58) ; v2(184.71,36.58) 185.41,36.58 ; v2(184.71,36.58) 184.71,37.28 ; 242.26,59.1 U51.3 ; U51.3 241.38,59.98 ; U51.3 243.14,59.98 ; U51.3 242.26,60.86 ; v4(109.25,47.98) 109.25,48.48 ; v4(109.25,47.98) 108.74,47.98 ; v4(109.25,47.98) 109.75,47.98 ; 138.26,27.41 v1(138.71,27.41) ; v1(138.71,27.41) 139.16,27.41 ; v1(138.71,27.41) 138.71,27.86 ; 137.27,36.58 v2(137.97,36.58) ; v2(137.97,36.58) 137.97,37.28 ; v2(137.97,36.58) 137.97,35.87 ; 96.52,57.15 v1(96.52,57.61) ; v1(96.52,57.61) 96.07,57.61 ; v1(96.52,57.61) 96.52,58.06 ; v1(96.52,57.61) 96.97,57.61 ; 154.35,98.82 v2(155.05,98.82) ; v2(155.05,98.82) 155.05,98.12 ; v2(155.05,98.82) 155.05,99.52 ; v2(155.05,98.82) 155.76,98.82 ; v2(85.6,57.15) 85.6,57.85 ; v2(85.6,57.15) 86.3,57.15 ; v2(85.6,57.15) 84.9,57.15 ; v2(85.6,57.15) 85.6,56.45 ; v1(64.26,26.42) 64.26,26.87 ; v1(64.26,26.42) 64.71,26.42 ; v1(64.26,26.42) 63.81,26.42 ; v1(64.26,26.42) 64.26,25.96 ; v3(111.7,36.08) 112.32,36.08 ; v3(111.7,36.08) 111.7,36.71 ; v3(111.7,36.08) 111.7,35.45 ; v3(111.7,36.08) 111.07,36.08 ; 82.36,62.23 v2(83.06,62.23) ; v2(83.06,62.23) 83.06,61.53 ; v2(83.06,62.23) 83.06,62.93 ; v2(83.06,62.23) 83.76,62.23 ; v2(102.64,37.92) 103.34,37.92 ; v2(102.64,37.92) 101.94,37.92 ; v2(102.64,37.92) 102.64,38.63 ; v2(102.64,37.92) 102.64,37.22 ; 169.7,21.7 v1(169.7,22.15) ; v1(169.7,22.15) 169.24,22.15 ; v1(169.7,22.15) 170.15,22.15 ; v1(169.7,22.15) 169.7,22.6 ; 234.38,90.46 U55.2 ; U55.2 235.26,91.34 ; U55.2 235.26,89.58 ; U55.2 236.14,90.46 ; v1(114.94,18.97) 114.94,19.43 ; v1(114.94,18.97) 114.94,18.52 ; v1(114.94,18.97) 114.48,18.97 ; v1(114.94,18.97) 115.39,18.97 ; 94.43,6.6 v3(95.06,6.6) ; v3(95.06,6.6) 95.69,6.6 ; v3(95.06,6.6) 95.06,7.23 ; v3(95.06,6.6) 95.06,5.98 ; 171.58,27.48 v1(172.03,27.48) ; v1(172.03,27.48) 172.49,27.48 ; v1(172.03,27.48) 172.03,27.94 ; v1(172.03,27.48) 172.03,27.03 ; v1(83.06,16.51) 83.51,16.51 ; v1(83.06,16.51) 83.06,16.06 ; v1(83.06,16.51) 83.06,16.96 ; v1(83.06,16.51) 82.61,16.51 ; v2(90.68,59.69) 90.68,60.39 ; v2(90.68,59.69) 90.68,58.99 ; v2(90.68,59.69) 91.38,59.69 ; v2(90.68,59.69) 89.98,59.69 ; v2(83.06,59.69) 83.76,59.69 ; v2(83.06,59.69) 82.36,59.69 ; v2(83.06,59.69) 83.06,58.99 ; v2(83.06,59.69) 83.06,60.39 ; v3(224.24,65.11) 224.87,65.11 ; v3(224.24,65.11) 224.24,64.49 ; v3(224.24,65.11) 223.61,65.11 ; v3(224.24,65.11) 224.24,65.74 ; v4(188.32,72.16) 188.82,72.16 ; v4(188.32,72.16) 188.32,71.66 ; v4(188.32,72.16) 188.32,72.66 ; v4(188.32,72.16) 187.81,72.16 ; v3(224.24,56.99) 224.87,56.99 ; v3(224.24,56.99) 223.61,56.99 ; v3(224.24,56.99) 224.24,57.61 ; v3(224.24,56.99) 224.24,56.36 ; v3(213.73,72.89) 213.73,73.51 ; v3(213.73,72.89) 213.1,72.89 ; v3(213.73,72.89) 214.35,72.89 ; v3(213.73,72.89) 213.73,72.26 ; v3(182.93,65.25) 182.93,65.88 ; v3(182.93,65.25) 182.93,64.62 ; v3(182.93,65.25) 183.56,65.25 ; v3(182.93,65.25) 182.3,65.25 ; v2(154.23,36.58) 154.93,36.58 ; v2(154.23,36.58) 154.23,35.87 ; v2(154.23,36.58) 153.53,36.58 ; v2(154.23,36.58) 154.23,37.28 ; v1(58.67,20.83) 58.67,21.28 ; v1(58.67,20.83) 58.67,20.38 ; v1(58.67,20.83) 59.13,20.83 ; v1(58.67,20.83) 58.22,20.83 ; 183.04,56.24 v4(183.54,56.24) ; v4(183.54,56.24) 184.04,56.24 ; v4(183.54,56.24) 183.54,56.74 ; v4(183.54,56.24) 183.54,55.73 ; 224.24,54.33 v3(224.24,54.95) ; v3(224.24,54.95) 224.87,54.95 ; v3(224.24,54.95) 223.61,54.95 ; v3(224.24,54.95) 224.24,55.58 ; U58.2 235.26,68.48 ; U58.2 234.38,67.6 ; U58.2 235.26,66.72 ; U58.2 236.14,67.6 ; 93.12,14.48 94.36,14.48 ; 94.36,14.48 94.36,15.72 ; 94.36,14.48 94.36,13.23 ; 94.36,14.48 95.61,14.48 ; v3(180.87,61.19) 181.5,61.19 ; v3(180.87,61.19) 180.87,60.56 ; v3(180.87,61.19) 180.25,61.19 ; v3(180.87,61.19) 180.87,61.82 ; 96.52,61.22 v1(96.52,61.67) ; v1(96.52,61.67) 96.52,62.12 ; v1(96.52,61.67) 96.97,61.67 ; v1(96.52,61.67) 96.07,61.67 ; v2(184.71,34.54) 184.71,35.25 ; v2(184.71,34.54) 185.41,34.54 ; v2(184.71,34.54) 184.71,33.84 ; v2(235.86,15.14) 235.86,15.84 ; v2(235.86,15.14) 236.57,15.14 ; v2(235.86,15.14) 235.86,14.44 ; v2(235.86,15.14) 235.16,15.14 ; v1(64.26,28.45) 64.71,28.45 ; v1(64.26,28.45) 63.81,28.45 ; v1(64.26,28.45) 64.26,28 ; v1(64.26,28.45) 64.26,28.9 ; 96.13,41.8 v3(96.13,42.43) ; v3(96.13,42.43) 96.75,42.43 ; v3(96.13,42.43) 95.5,42.43 ; v3(96.13,42.43) 96.13,43.06 ; 163.49,104.15 v2(164.2,104.15) ; v2(164.2,104.15) 164.9,104.15 ; v2(164.2,104.15) 164.2,103.45 ; v2(164.2,104.15) 164.2,104.86 ; v2(237.44,11.46) 237.44,12.16 ; v2(237.44,11.46) 236.74,11.46 ; v2(237.44,11.46) 237.44,10.75 ; v2(237.44,11.46) 238.14,11.46 ; 222.22,5.27 U43.2 ; U43.2 224.58,5.27 ; U43.2 223.4,6.45 ; U43.2 223.4,4.09 ; 208.7,72.23 v3(208.7,72.86) ; v3(208.7,72.86) 209.33,72.86 ; v3(208.7,72.86) 208.07,72.86 ; v3(208.7,72.86) 208.7,73.49 ; U54.3 243.14,37.12 ; U54.3 242.26,38 ; U54.3 242.26,36.24 ; U54.3 241.38,37.12 ; 93.22,52.9 v4(93.22,53.41) ; v4(93.22,53.41) 93.22,53.91 ; v4(93.22,53.41) 92.72,53.41 ; v4(93.22,53.41) 93.72,53.41 ; 155.42,26.98 v1(155.42,27.43) ; v1(155.42,27.43) 155.42,27.88 ; v1(155.42,27.43) 155.88,27.43 ; v1(155.42,27.43) 154.97,27.43 ; 224.24,52.29 v3(224.24,52.92) ; v3(224.24,52.92) 224.87,52.92 ; v3(224.24,52.92) 224.24,53.55 ; v3(224.24,52.92) 223.61,52.92 ; U51.2 236.14,59.98 ; U51.2 235.26,60.86 ; U51.2 235.26,59.1 ; U51.2 234.38,59.98 ; 100.56,35.06 v2(100.56,35.76) ; v2(100.56,35.76) 99.86,35.76 ; v2(100.56,35.76) 100.56,36.47 ; v2(100.56,35.76) 101.26,35.76 ; U56.3 242.26,83.72 ; U56.3 243.14,82.84 ; U56.3 242.26,81.96 ; U56.3 241.38,82.84 ; 111.02,32.02 v3(111.65,32.02) ; v3(111.65,32.02) 112.27,32.02 ; v3(111.65,32.02) 111.65,32.64 ; v3(111.65,32.02) 111.65,31.39 ; 120.51,36.58 v2(121.21,36.58) ; v2(121.21,36.58) 121.21,37.28 ; v2(121.21,36.58) 121.21,35.87 ; v1(80.77,3.81) 80.77,4.26 ; v1(80.77,3.81) 81.22,3.81 ; v1(80.77,3.81) 80.77,3.36 ; v1(80.77,3.81) 80.32,3.81 ; 96.25,38.12 v3(96.25,38.75) ; v3(96.25,38.75) 96.25,39.38 ; v3(96.25,38.75) 95.63,38.75 ; v3(96.25,38.75) 96.88,38.75 ; v3(213.73,74.87) 214.35,74.87 ; v3(213.73,74.87) 213.73,74.24 ; v3(213.73,74.87) 213.73,75.5 ; v3(213.73,74.87) 213.1,74.87 ; 168.2,35.87 v2(168.2,36.58) ; v2(168.2,36.58) 168.2,37.28 ; v2(168.2,36.58) 168.9,36.58 ; v2(134.73,50.56) 134.73,51.26 ; v2(134.73,50.56) 134.73,49.86 ; v2(134.73,50.56) 135.44,50.56 ; v2(209.92,104.15) 209.92,104.86 ; v2(209.92,104.15) 209.92,103.45 ; v2(209.92,104.15) 209.21,104.15 ; v2(209.92,104.15) 210.62,104.15 ; 170.99,35.87 v2(170.99,36.58) ; v2(170.99,36.58) 170.99,37.28 ; v2(170.99,36.58) 170.29,36.58 ; v2(170.99,34.54) 170.99,35.25 ; v2(170.99,34.54) 170.29,34.54 ; v2(170.99,34.54) 170.99,33.84 ; v2(149.12,65.58) 149.12,66.29 ; v2(149.12,65.58) 149.83,65.58 ; v2(149.12,65.58) 149.12,64.88 ; v2(149.12,65.58) 148.42,65.58 ; 134.03,48.53 v2(134.73,48.53) ; v2(134.73,48.53) 134.73,47.83 ; v2(134.73,48.53) 135.44,48.53 ; v2(134.73,48.53) 134.73,49.23 ; v1(136.65,22.42) 136.65,22.87 ; v1(136.65,22.42) 136.2,22.42 ; v1(136.65,22.42) 137.1,22.42 ; v2(180.26,45.21) 180.26,45.91 ; v2(180.26,45.21) 180.26,44.51 ; v2(180.26,45.21) 179.56,45.21 ; v2(180.26,45.21) 180.97,45.21 ; 193.97,104.15 v2(194.68,104.15) ; v2(194.68,104.15) 194.68,104.86 ; v2(194.68,104.15) 194.68,103.45 ; v2(194.68,104.15) 195.38,104.15 ; 220.68,27.29 U40.2 ; U40.2 221.62,26.35 ; U40.2 221.62,28.23 ; U40.2 222.55,27.29 ; 156.27,55.12 v2(156.97,55.12) ; v2(156.97,55.12) 156.97,54.42 ; v2(156.97,55.12) 156.97,55.82 ; v2(156.97,55.12) 157.67,55.12 ; v2(135.31,36.58) 135.31,37.28 ; v2(135.31,36.58) 135.31,35.87 ; v2(135.31,36.58) 136.01,36.58 ; v2(135.31,36.58) 134.6,36.58 ; 111,55.2 v4(111,55.7) ; v4(111,55.7) 111,56.21 ; v4(111,55.7) 110.5,55.7 ; v4(111,55.7) 111.5,55.7 ; 134.6,34.54 v2(135.31,34.54) ; v2(135.31,34.54) 136.01,34.54 ; v2(135.31,34.54) 135.31,35.25 ; v2(135.31,34.54) 135.31,33.84 ; v1(119.89,22.4) 119.89,22.86 ; v1(119.89,22.4) 120.34,22.4 ; v1(119.89,22.4) 119.89,21.95 ; v1(119.89,22.4) 119.44,22.4 ; 98.15,71.32 v1(98.6,71.32) ; v1(98.6,71.32) 98.6,70.87 ; v1(98.6,71.32) 98.6,71.78 ; v1(98.6,71.32) 99.06,71.32 ; J2.5 23.32,12.45 ; J2.5 23.32,10.41 ; J2.5 22.3,11.43 ; J2.5 24.33,11.43 ; 141.81,98.82 v2(142.51,98.82) ; v2(142.51,98.82) 143.21,98.82 ; v2(142.51,98.82) 142.51,99.52 ; v2(142.51,98.82) 142.51,98.12 ; v2(151.69,34.54) 152.39,34.54 ; v2(151.69,34.54) 150.99,34.54 ; v2(151.69,34.54) 151.69,33.84 ; v2(151.69,34.54) 151.69,35.25 ; 190.2,64.21 v4(190.7,64.21) ; v4(190.7,64.21) 191.21,64.21 ; v4(190.7,64.21) 190.7,63.71 ; v4(190.7,64.21) 190.7,64.71 ; 142.48,60.02 v2(142.48,60.72) ; v2(142.48,60.72) 143.18,60.72 ; v2(142.48,60.72) 141.78,60.72 ; v2(142.48,60.72) 142.48,61.42 ; v4(108.92,55.68) 108.92,56.18 ; v4(108.92,55.68) 109.42,55.68 ; v4(108.92,55.68) 108.41,55.68 ; v4(108.92,55.68) 108.92,55.17 ; v1(96.52,59.64) 96.97,59.64 ; v1(96.52,59.64) 96.07,59.64 ; v1(96.52,59.64) 96.52,59.19 ; v1(96.52,59.64) 96.52,60.09 ; 157.61,73.91 v3(158.24,73.91) ; v3(158.24,73.91) 158.87,73.91 ; v3(158.24,73.91) 158.24,74.54 ; v3(158.24,73.91) 158.24,73.29 ; 192.08,69.03 v4(192.08,69.53) ; v4(192.08,69.53) 192.59,69.53 ; v4(192.08,69.53) 191.58,69.53 ; v4(192.08,69.53) 192.08,70.03 ; 108.69,46.99 v4(109.19,46.99) ; v4(109.19,46.99) 109.19,46.49 ; v4(109.19,46.99) 109.7,46.99 ; 190.4,71.71 v4(190.4,72.21) ; v4(190.4,72.21) 189.9,72.21 ; v4(190.4,72.21) 190.4,72.71 ; v4(190.4,72.21) 190.9,72.21 ; v1(96.52,63.83) 96.52,64.28 ; v1(96.52,63.83) 96.52,63.38 ; v1(96.52,63.83) 96.07,63.83 ; v1(96.52,63.83) 96.97,63.83 ; v2(88.14,59.69) 88.84,59.69 ; v2(88.14,59.69) 88.14,60.39 ; v2(88.14,59.69) 88.14,58.99 ; v2(88.14,59.69) 87.44,59.69 ; U49.2 196.73,6.45 ; U49.2 195.55,5.27 ; U49.2 197.91,5.27 ; U49.2 196.73,4.09 ; 190.72,52.81 v1(191.17,52.81) ; v1(191.17,52.81) 191.62,52.81 ; v1(191.17,52.81) 191.17,52.35 ; v1(191.17,52.81) 191.17,53.26 ; 136.2,22.38 v1(136.65,22.38) ; v1(136.65,22.38) 137.1,22.38 ; v1(136.65,22.38) 136.65,21.92 ; 116.26,69.7 v1(116.71,69.7) ; v1(116.71,69.7) 117.17,69.7 ; v1(116.71,69.7) 116.71,69.24 ; 66.89,62.67 U31.5 66.89,65.83 ; 98.1,69.34 v1(98.55,69.34) ; v1(98.55,69.34) 98.55,68.89 ; v1(98.55,69.34) 99,69.34 ; v1(98.55,69.34) 98.55,69.79 ; 25.2,30.48 v1(25.65,30.48) ; v1(25.65,30.48) 26.11,30.48 ; v1(25.65,30.48) 25.65,30.03 ; v1(25.65,30.48) 25.65,30.93 ; 77.22,40.7 v2(77.22,41.4) ; v2(77.22,41.4) 76.51,41.4 ; v2(77.22,41.4) 77.22,42.1 ; v2(77.22,41.4) 77.92,41.4 ; v1(25.65,28.45) 26.11,28.45 ; v1(25.65,28.45) 25.2,28.45 ; v1(25.65,28.45) 25.65,28.9 ; v1(25.65,28.45) 25.65,28 ; 87.44,57.15 v2(88.14,57.15) ; v2(88.14,57.15) 88.14,57.85 ; v2(88.14,57.15) 88.14,56.45 ; v2(88.14,57.15) 88.84,57.15 ; v3(111.67,29.96) 112.3,29.96 ; v3(111.67,29.96) 111.67,29.33 ; v3(111.67,29.96) 111.67,30.59 ; v3(111.67,29.96) 111.04,29.96 ; v2(154.23,34.54) 154.93,34.54 ; v2(154.23,34.54) 154.23,33.84 ; v2(154.23,34.54) 154.23,35.25 ; v2(154.23,34.54) 153.53,34.54 ; 186.14,83.87 v3(186.77,83.87) ; v3(186.77,83.87) 186.77,84.5 ; v3(186.77,83.87) 186.77,83.24 ; v3(186.77,83.87) 187.39,83.87 ; 82.36,57.15 v2(83.06,57.15) ; v2(83.06,57.15) 83.76,57.15 ; v2(83.06,57.15) 83.06,57.85 ; v2(83.06,57.15) 83.06,56.45 ; 223.61,61.05 v3(224.24,61.05) ; v3(224.24,61.05) 224.24,60.42 ; v3(224.24,61.05) 224.24,61.68 ; v3(224.24,61.05) 224.87,61.05 ; 175.88,67.44 v2(176.58,67.44) ; v2(176.58,67.44) 176.58,68.14 ; v2(176.58,67.44) 176.58,66.73 ; v2(176.58,67.44) 177.28,67.44 ; 83.89,79.22 P1.3 84.82,78.29 ; 241.38,52.36 U52.3 ; U52.3 242.26,53.24 ; U52.3 243.14,52.36 ; U52.3 242.26,51.48 ; v2(168.2,34.54) 168.9,34.54 ; v2(168.2,34.54) 168.2,35.25 ; v2(168.2,34.54) 168.2,33.84 ; v1(47.68,23.37) 47.68,23.82 ; v1(47.68,23.37) 47.22,23.37 ; v1(47.68,23.37) 47.68,22.92 ; v1(47.68,23.37) 48.13,23.37 ; 89.98,62.23 v2(90.68,62.23) ; v2(90.68,62.23) 90.68,61.53 ; v2(90.68,62.23) 91.38,62.23 ; v2(90.68,62.23) 90.68,62.93 ; v1(122.05,27.43) 122.5,27.43 ; v1(122.05,27.43) 121.59,27.43 ; v1(122.05,27.43) 122.05,27.88
  GND w2.54: 70.36,65.28 69.33,64.25 U31.5 63.77,64.25 63.25,64.77
  BOTTOM w0.203: C73.2 C72.2 113.17,62.04 v1(112.65,62.56) ; v1(116.71,69.7) 117.31,69.7 C70.2 C71.2 ; U6.2 v3(101.6,10.41) ; v1(136.65,22.42) v1(136.65,22.38)
  BOTTOM w0.254: C46.2 C47.2 v1(131.7,70.36) ; C76.2 C78.2
  BOTTOM w0.381: U11.9 157.92,73.52 158.24,73.85 v3(158.24,73.91)
  BOTTOM w0.508: R93.1 58.32,56.83 60.86,54.29 R95.2 60.96,58.32 U31.5
